# Altium PCB karmanDB.PcbDoc (part 1 of 2)
Units mil, origin at the board's own origin, x right, y up, seen from the top; angles counter-clockwise.
Board outline 6100 x 3250 mil, 4 copper layers (Top Layer, Ground Plane, Power Plane, Bottom Layer), stack 64.4 mil thick; 205 components, 131 nets, 669 pads, 419 vias.
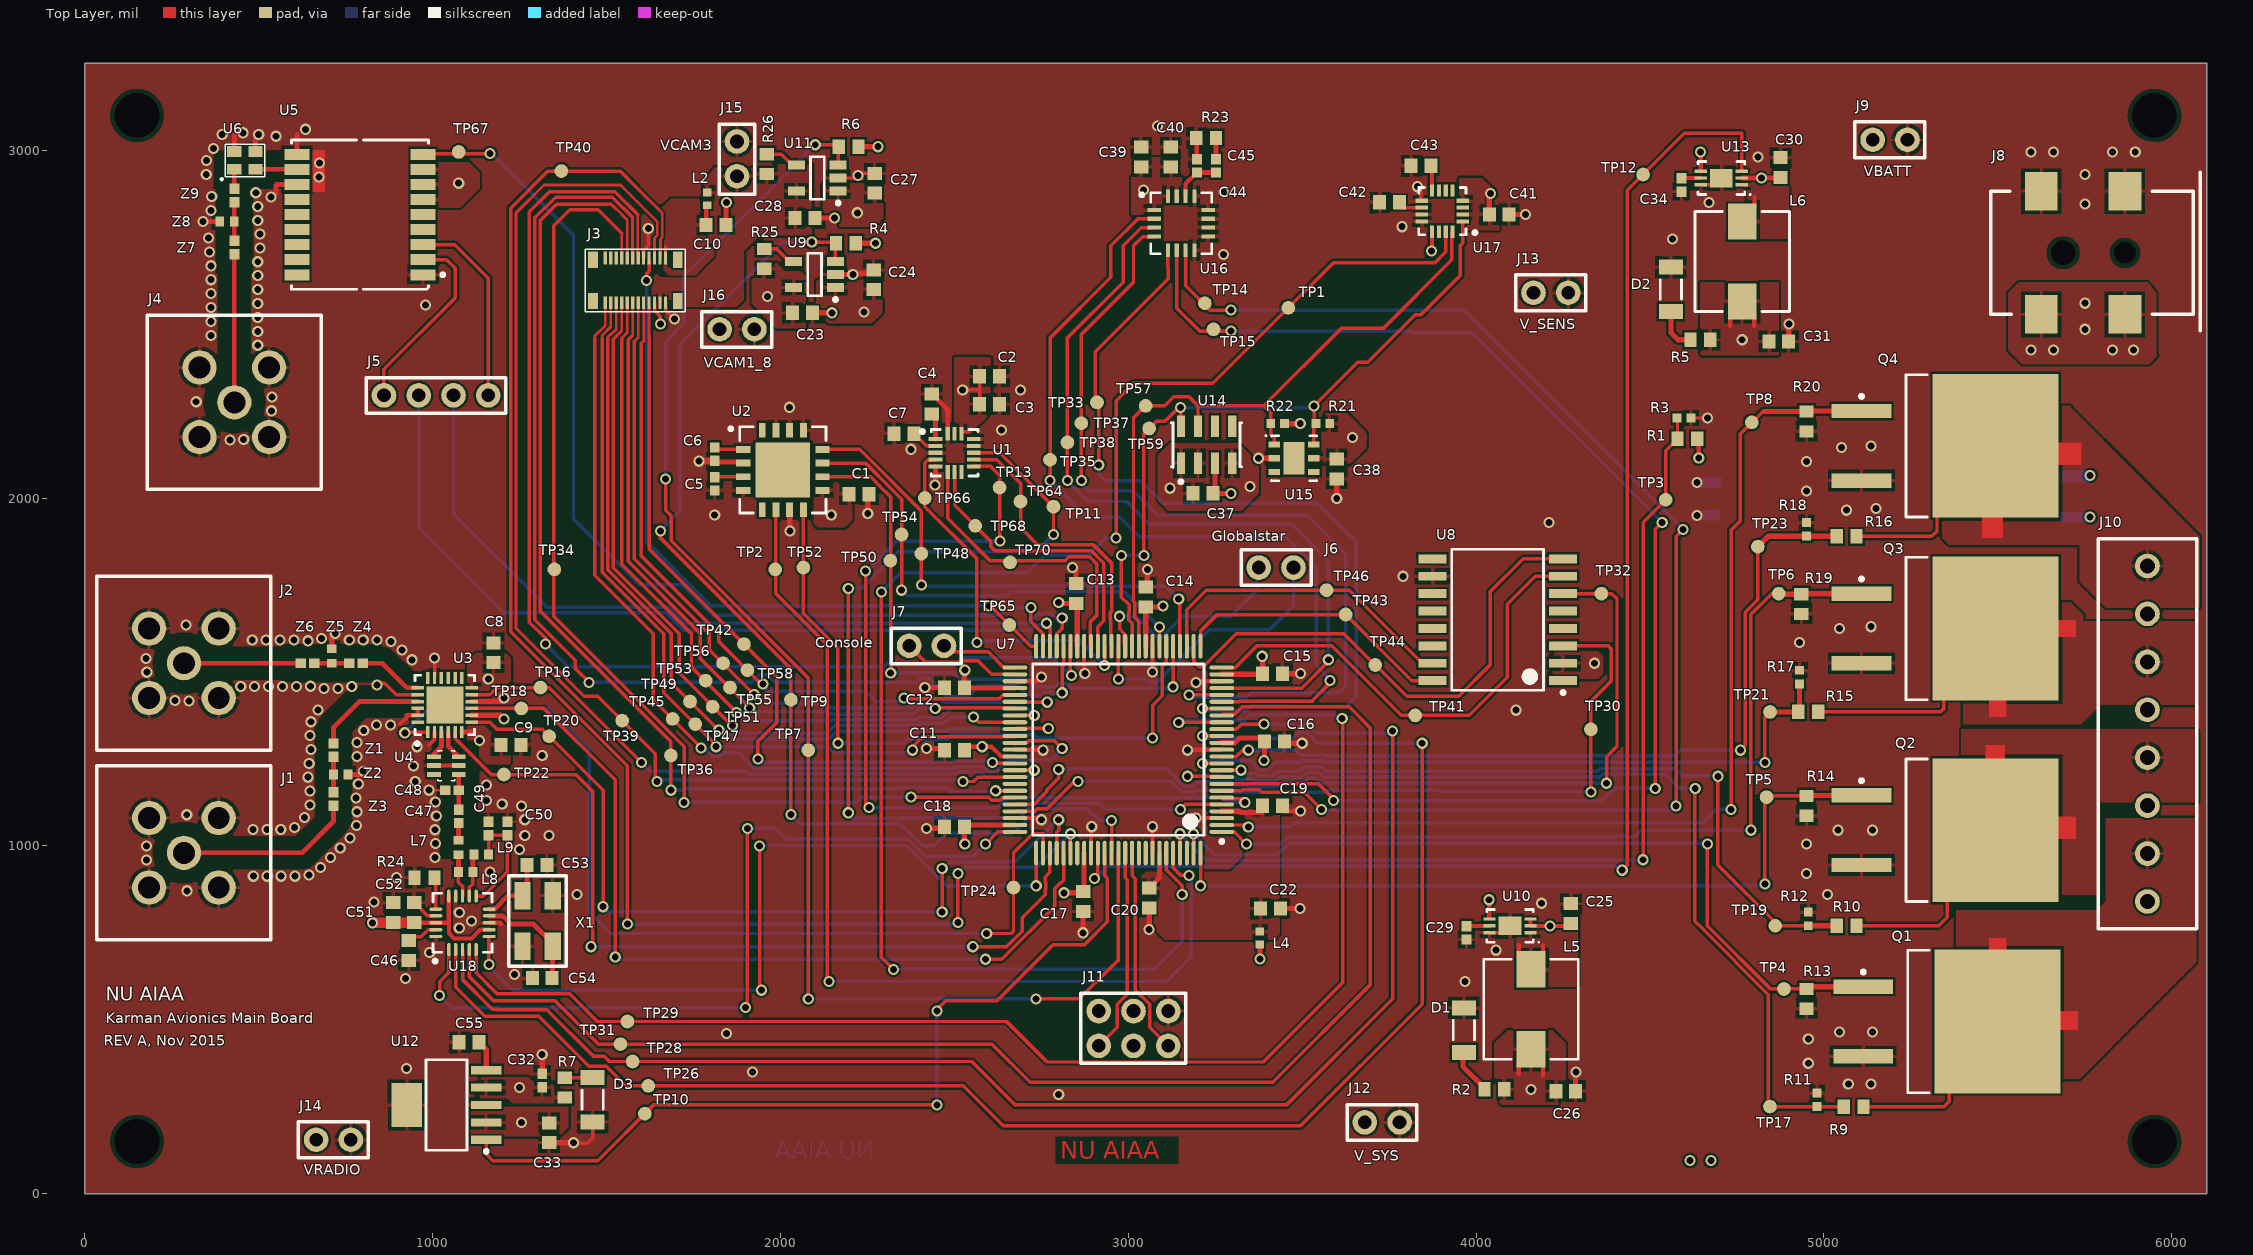
[diagram p0: Top Layer view]
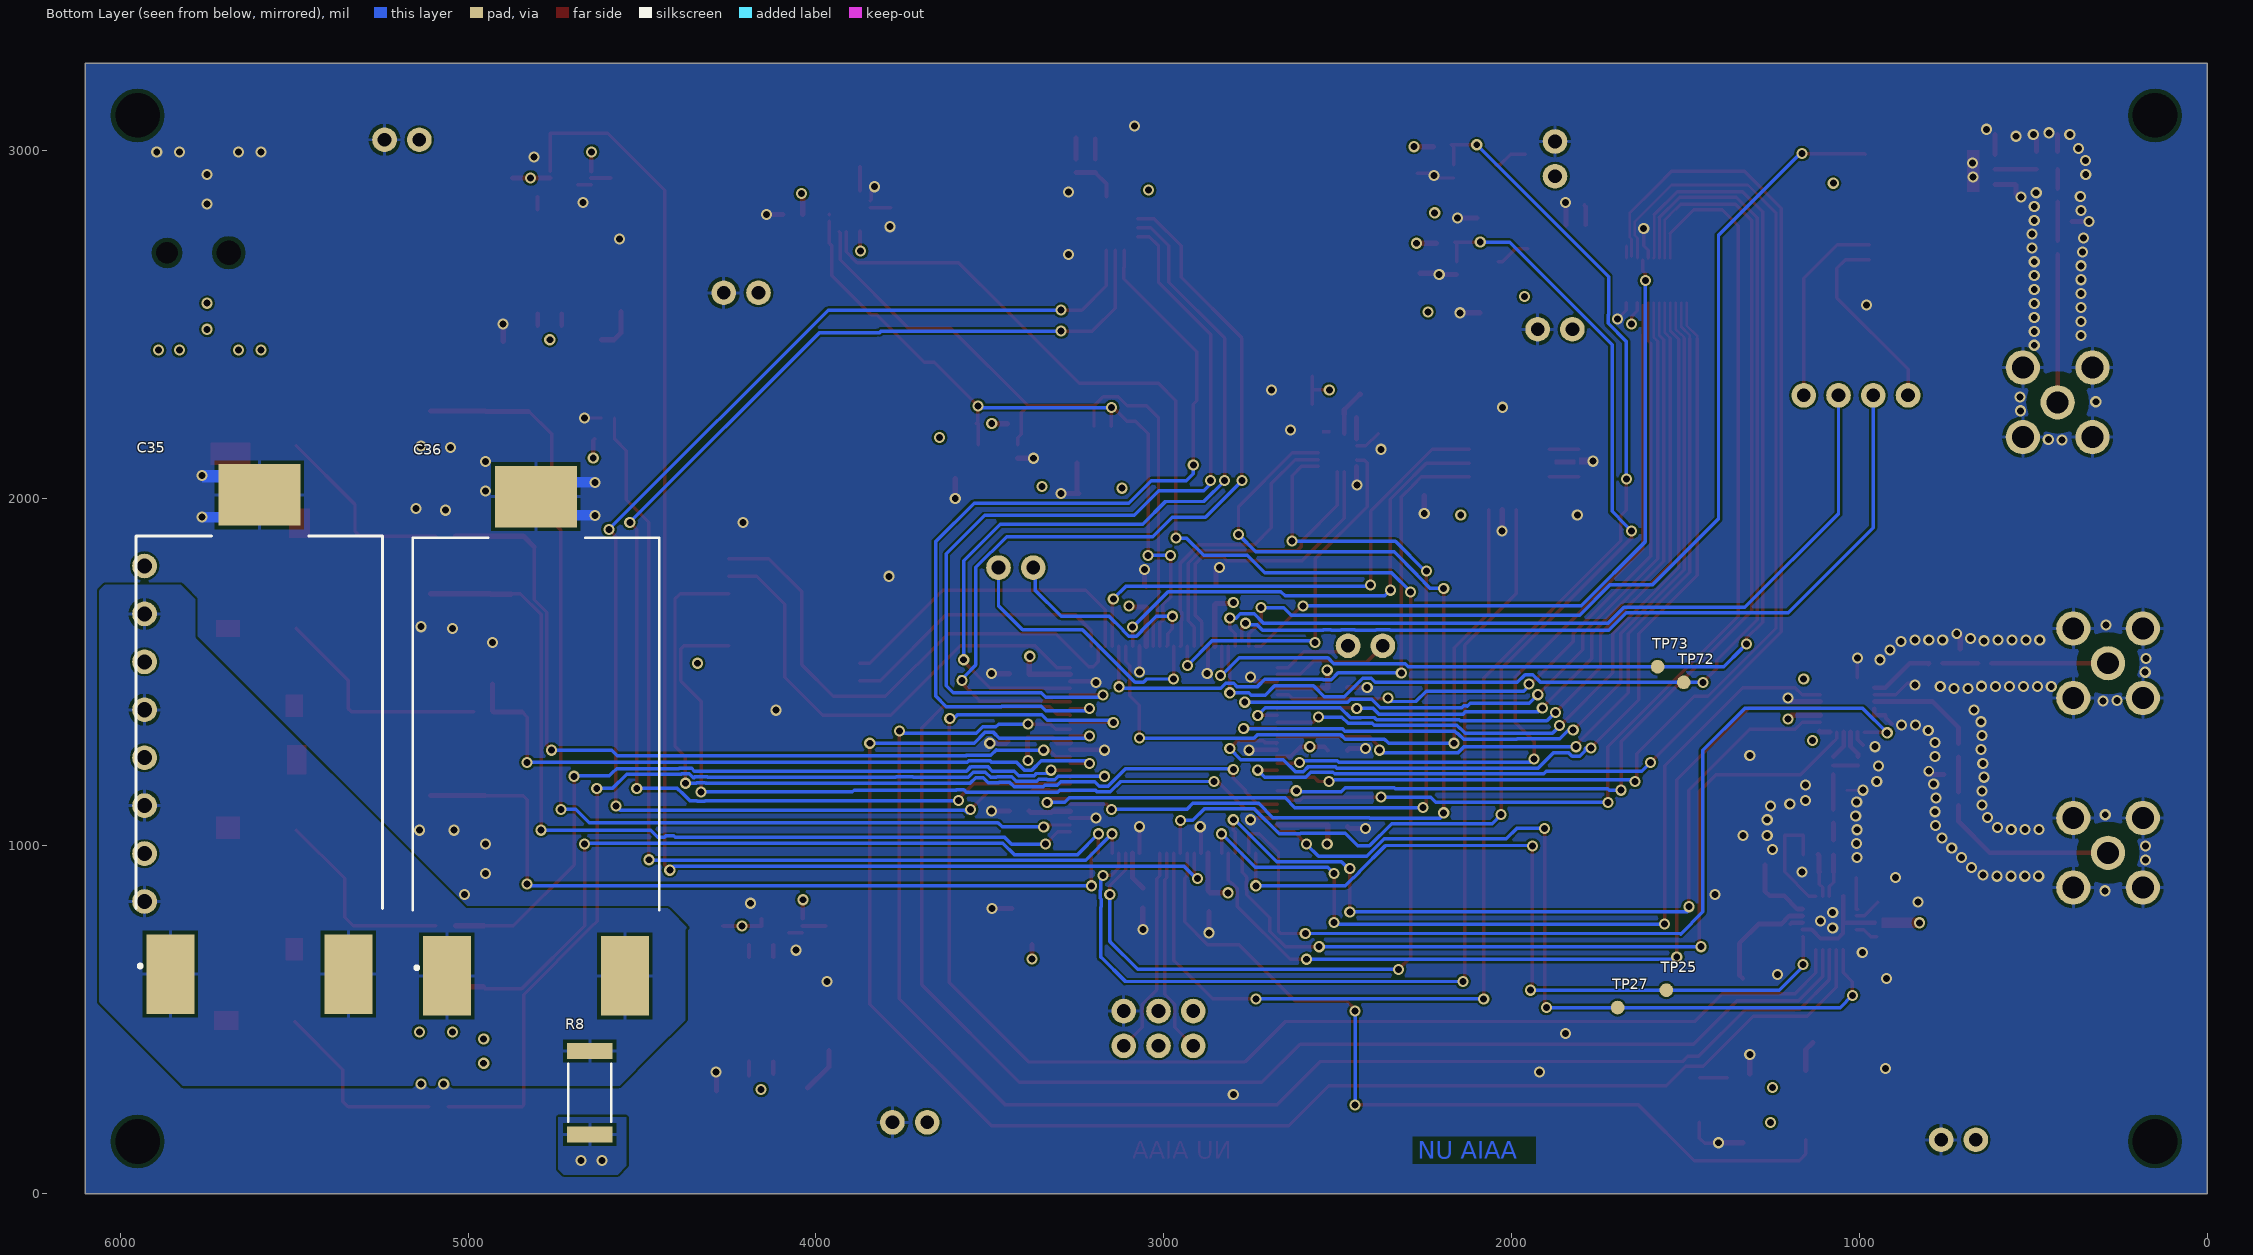
[diagram p1: Bottom Layer view, seen from below]
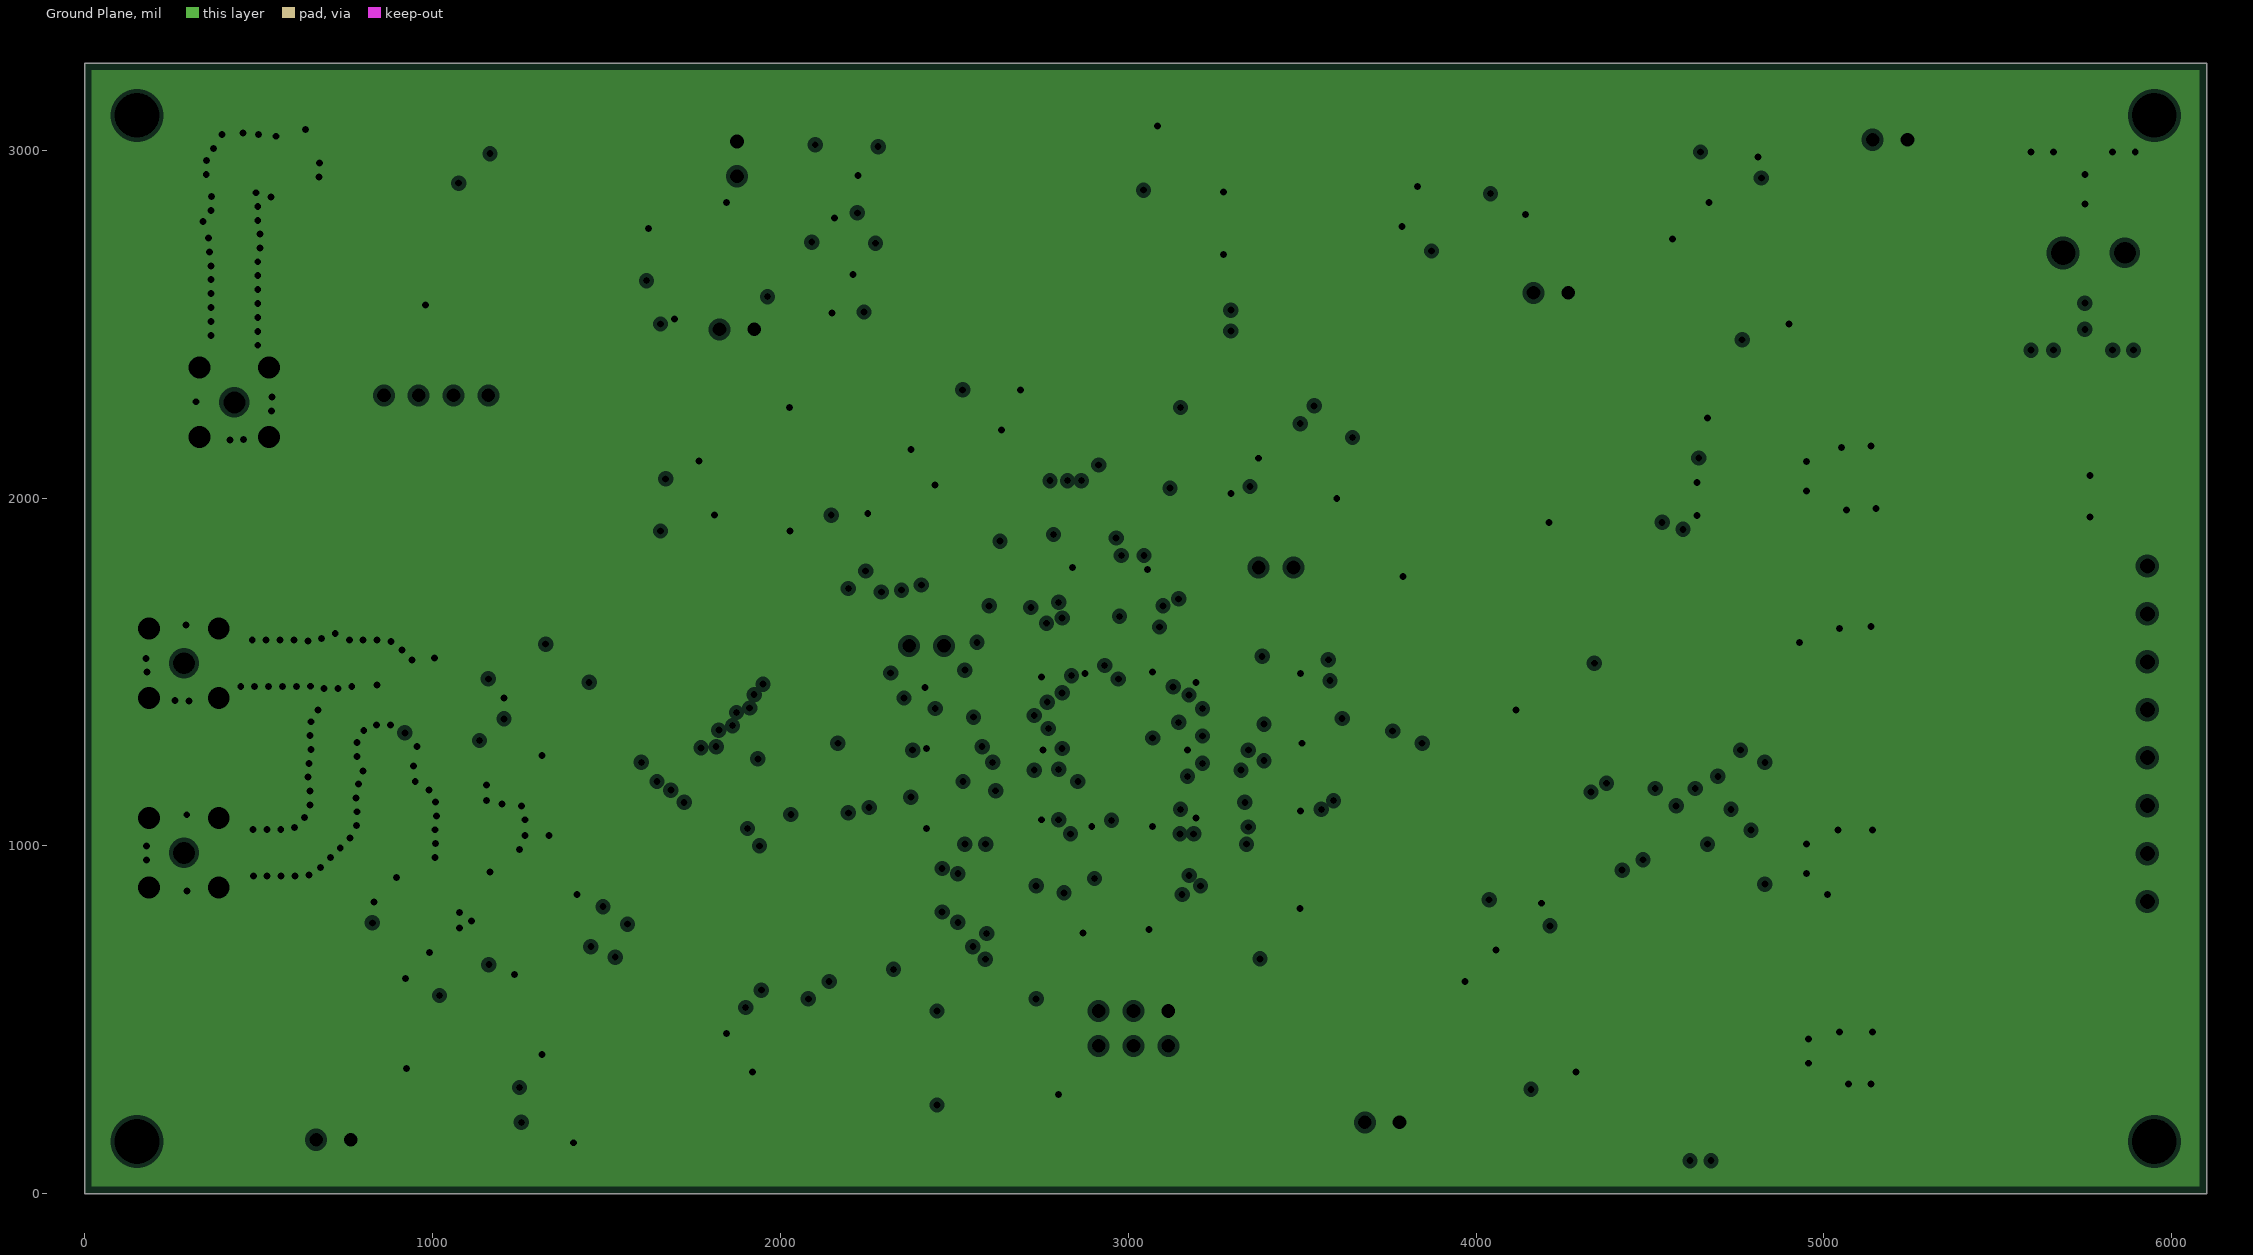
[diagram p2: Ground Plane, clearances drawn from the general rule]
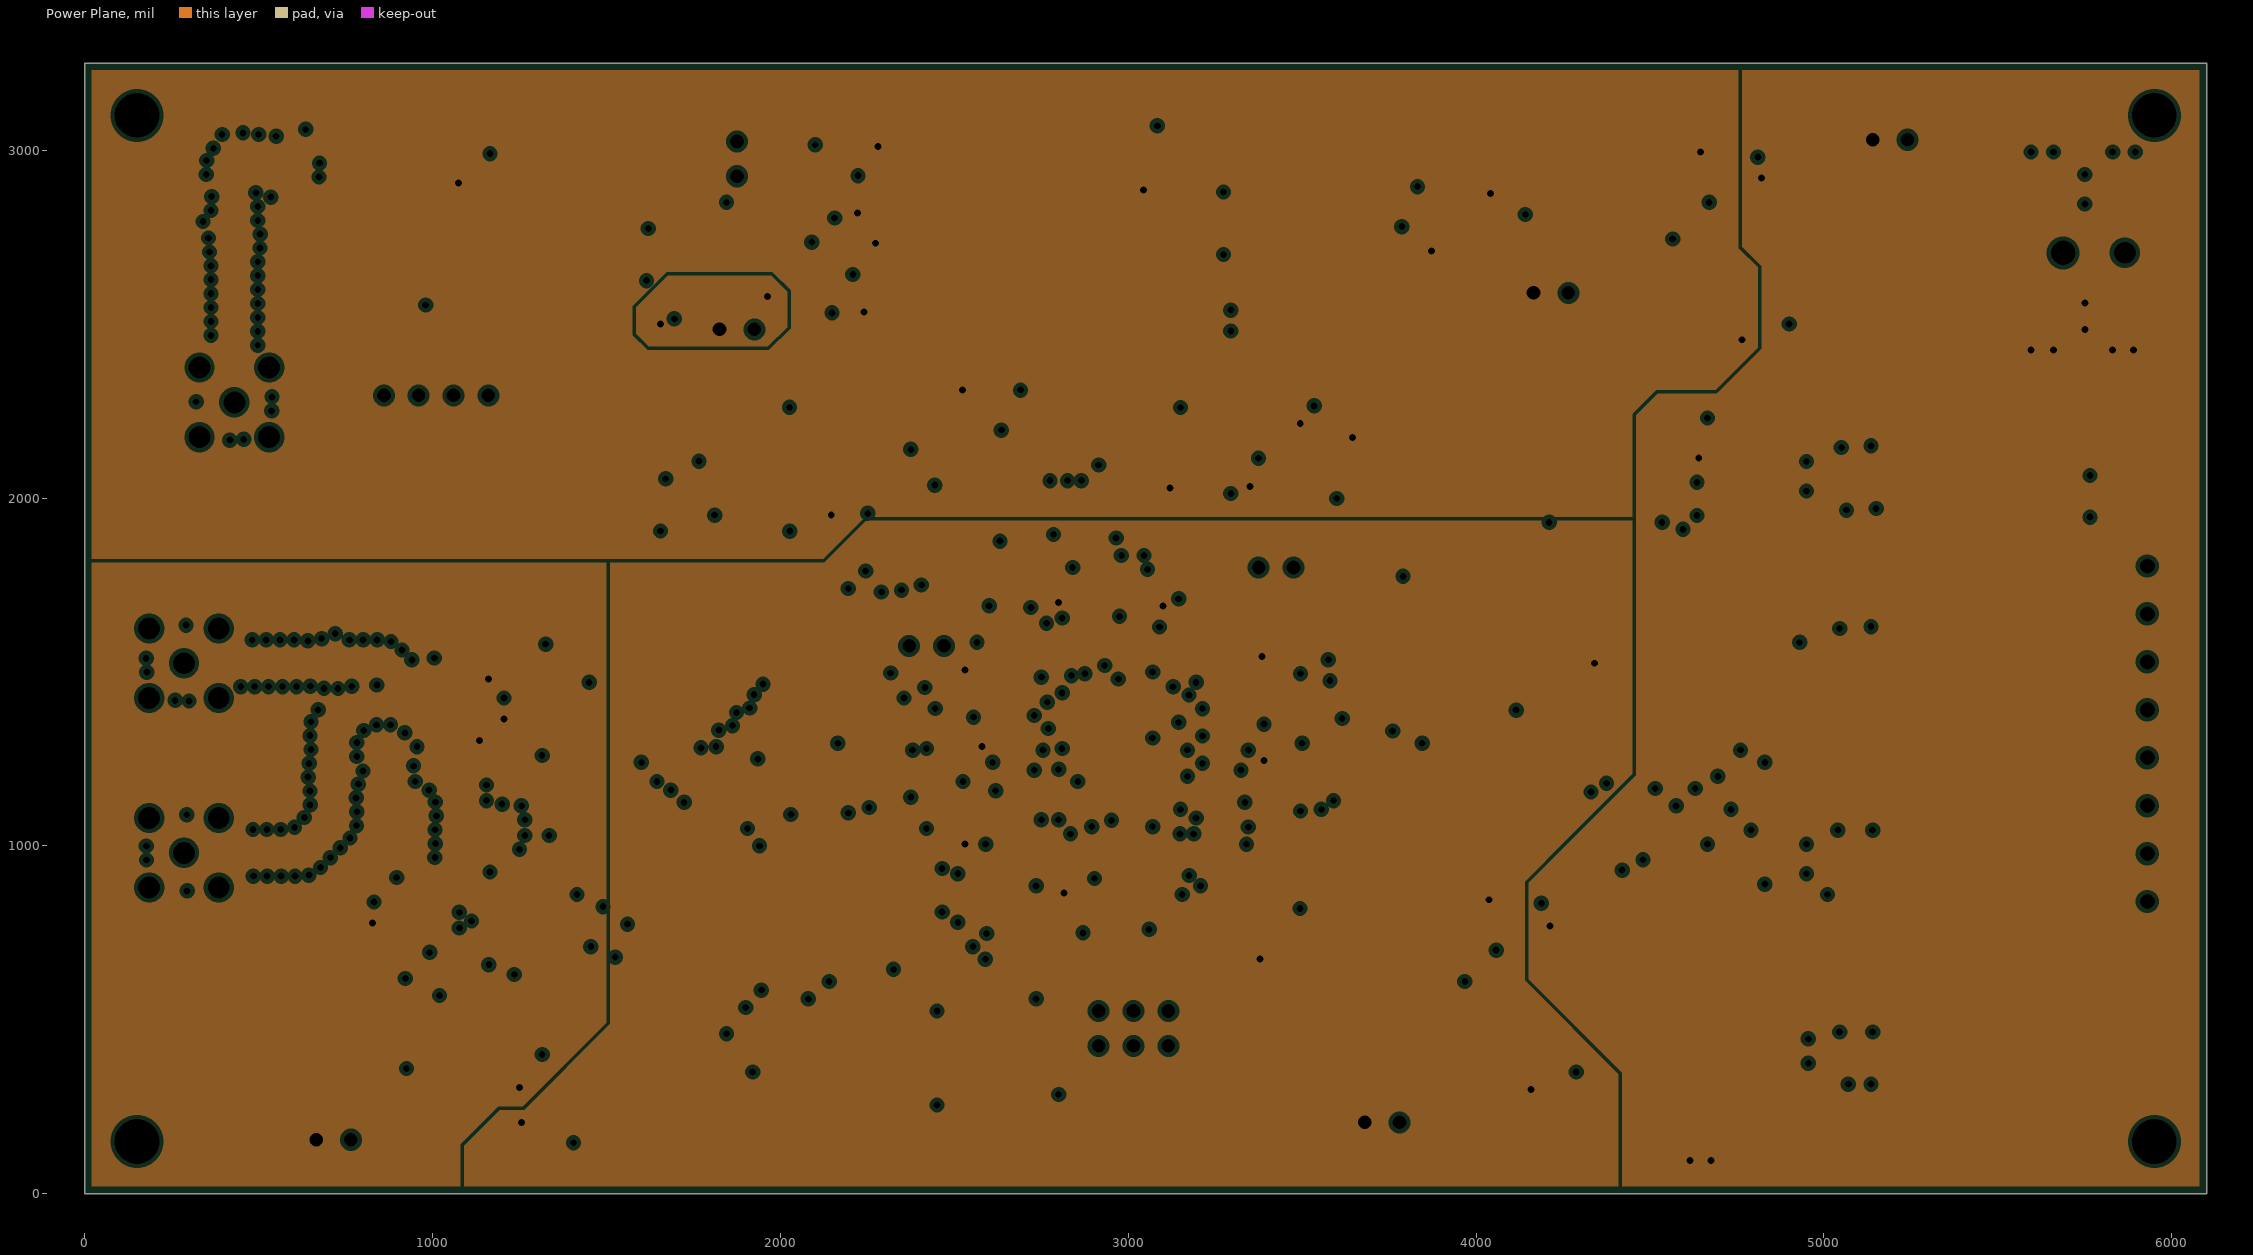
[diagram p3: Power Plane, clearances drawn from the general rule]

## Layer stack, top to bottom
Top Solder: solder mask 0.4, Solder Resist, Dk 3.5
Top Layer: signal copper 1.4
Dielectric 1: prepreg 9.4, FR-4, Dk 4.2
Ground Plane: plane copper 1.4, net GND
Dielectric 3: core 40, FR-4, Dk 4.2
Power Plane: plane copper 1.4, net (Multiple Nets)
Dielectric 2: prepreg 9.4, FR-4, Dk 4.2
Bottom Layer: signal copper 1.4
Bottom Solder: solder mask 0.4, Solder Resist, Dk 3.5

## Board outline
0,0 0,3250 6100,3250 6100,0

## Design rules (kind name [scope] priority, off if disabled: settings)
Clearance Clearance_NPTH [(InPadClass('NPTH'))] p1: gap=12
Clearance 100_Clearance [InNetClass('100_Match_Class') vs InPolygon] p2: gap=40
Clearance 50_Clearance [InNetClass('50_Match_Class') vs InPolygon] p3: gap=40
Clearance [All] p4: gap=6
ComponentClearance ComponentClearance_testpoint [Comment = 'test_point'] p1: gap=0 collisioncheckmode=3 verticalgap=100000 showdistances=FALSE
ComponentClearance [All] p2: gap=10 collisioncheckmode=3 verticalgap=10 showdistances=FALSE
HoleSize [All] p1: absolutevalues=TRUE maxlimit=100 minlimit=15 maxpercent=80.000 minpercent=20.000
MinimumSolderMaskSliver [All] p1: minsoldermaskwidth=6
PlaneClearance MicrostripClearance_1 [(InNetClass('100_Match_Class') OR InNetClass('50_Match_Class'))] p1: clearance=40
PlaneClearance [All] p2: clearance=12
PlaneConnect PlaneConnect_GND [InNet('GND')] p1: planeconnectstyle=Direct reliefexpansion=20 reliefentries=4 reliefconductorwidth=10 reliefairgap=10
PlaneConnect PlaneConnect_1 [All] p2: planeconnectstyle=Relief reliefexpansion=20 reliefentries=4 reliefconductorwidth=10 reliefairgap=10
PolygonConnect PolygonConnect_Via [IsVia] p1: connectstyle=Direct reliefconductorwidth=10 reliefentries=4 polygonreliefangle="90 Angle" airgapwidth=10
PolygonConnect [All] p2: connectstyle=Relief reliefconductorwidth=10 reliefentries=4 polygonreliefangle="90 Angle" airgapwidth=10
RoomDefinition karmanDB_sensors2 [InComponentClass('karmanDB_sensors2')] p1: confinementstyle=ConfineIn formatcopy=TRUE lockcomponents=FALSE outline 2810,2575.71 4422.09,2575.71 4422.09,3090 2810,3090
RoomDefinition karmanDB_sensors1 [InComponentClass('karmanDB_sensors1')] p2: confinementstyle=ConfineIn formatcopy=TRUE lockcomponents=FALSE outline 2979.37,1944.37 3875,1944.37 3875,2300 2979.37,2300
RoomDefinition karmanDB_mem [InComponentClass('karmanDB_mem')] p3: confinementstyle=ConfineIn formatcopy=TRUE lockcomponents=FALSE outline 4385,1930 3742.01,1930 3742.01,1320 4385,1320
RoomDefinition karmanDB_MCU [InComponentClass('karmanDB_MCU')] p4: confinementstyle=ConfineIn formatcopy=TRUE lockcomponents=FALSE outline 3705,1815 2220,1815 2220,305 3705,305
RoomDefinition karmanDB_camera [InComponentClass('karmanDB_camera')] p5: confinementstyle=ConfineIn formatcopy=TRUE lockcomponents=FALSE outline 1396.5,2965 1396.5,2520 2227.99,2520 2227.99,2965
RoomDefinition karmanDB_accel [InComponentClass('karmanDB_accel')] p6: confinementstyle=ConfineIn formatcopy=TRUE lockcomponents=FALSE outline 1746.77,1890.87 2760.95,1890.87 2760.95,2449.41 1746.77,2449.41
RoutingVias [All] p1: holewidth=20 width=30 viastyle="Through Hole" minholewidth=15 minwidth=25 maxholewidth=28 maxwidth=50
SilkToSilkClearance [All] p1 off: silktosilkclearance=10
SolderMaskExpansion [All] p1: expansion=4
UnpouredPolygon [All] p1: allowunpoured=FALSE
Width 50_MATCH [InNetClass('50_Match_Class')] p1: maxlimit=13.68 minlimit=13.68 preferedwidth=13.68 impedancedriven=TRUE minimp=50.000000 maximp=50.000000 favimp=50.000000
Width 100_MATCH [InNetClass('100_Match_Class')] p2: maxlimit=13.68 minlimit=13.68 preferedwidth=13.68 impedancedriven=TRUE minimp=50.000000 maximp=50.000000 favimp=50.000000
Width [All] p3: maxlimit=20 minlimit=8 preferedwidth=10
23 further rules are at their usual default settings.

## Classes and differential pairs
pad class NPTH: Free-NPTH-0 Free-NPTH-1 Free-NPTH-2 Free-NPTH-3 J8-5 J8-6
net class 100_Match_Class: NetU3_4
net class 50_Match_Class: NetC47_1 NetC47_2 NetJ1_PIN NetJ2_PIN NetJ4_PIN NetU3_19 NetU3_21 NetU5_11 NetU6_1 NetZ1_2 NetZ4_2 NetZ7_2
net class PH[0..7]: PH0 PH1 PH2 PH3 PH4 PH5 PH6 PH7
component class karmanDB_transceiver: C46 C47 C48 C49 C50 C51 C52 C53 C54 L7 L8 L9 R24 U18 X1
component class karmanDB_testpoints: TP1 TP2 TP3 TP4 TP5 TP6 TP7 TP8 TP9 TP10 TP11 TP12 TP13 TP14 TP15 TP16 TP17 TP18 TP19 TP20 TP21 TP22 TP23 TP24 TP25 TP26 TP27 TP28 TP29 TP30 TP31 TP32 TP33 TP34 TP35 TP36 TP37 TP38 TP39 TP40 TP41 TP42 TP43 TP44 TP45 TP46 TP47 TP48 TP49 TP50 TP51 TP52 TP53 TP54 TP55 TP56 TP57 TP58 TP59 TP64 TP65 TP66 TP67 TP68 TP70 TP72 TP73
component class karmanDB_sensors2: C39 C40 C41 C42 C43 C44 C45 R23 U16 U17
component class karmanDB_sensors1: C37 C38 R21 R22 U14 U15
component class karmanDB_pyro: C35 C36 J10 Q1 Q2 Q3 Q4 R8 R9 R10 R11 R12 R13 R14 R15 R16 R17 R18 R19 R20
component class karmanDB_power: C23 C24 C25 C26 C27 C28 C29 C30 C31 C32 C33 C34 C55 D1 D2 D3 J8 J9 J12 J13 J14 J15 J16 L5 L6 R1 R2 R3 R4 R5 R6 R7 R25 R26 U9 U10 U11 U12 U13
component class karmanDB_mem: U8
component class karmanDB_MCU: C11 C12 C13 C14 C15 C16 C17 C18 C19 C20 C22 J7 J11 L4 U7
component class karmanDB_gps&gs: J4 J5 J6 U5 U6 Z7 Z8 Z9
component class karmanDB_camera: C10 J3 L2
component class karmanDB_amp: C8 C9 J1 J2 U3 U4 Z1 Z2 Z3 Z4 Z5 Z6
component class karmanDB_accel: C1 C2 C3 C4 C5 C6 C7 U1 U2

## Components (designator, comment, footprint, x,y, rotation, side; value= is the part's Value field where it differs from the comment)
C1 "100n" MURATA_GRM_0603 2226.02,2010.87 r0 top
C2 "100n" MURATA_GRM_0603 2601.46,2350 r0 top
C3 "4.7u" MURATA_GRM_0603 2601.46,2270 r0 top
C4 "100n" MURATA_GRM_0603 2435,2270 r90 top
C5 "1uF" MURATA_GRM_0402 1811.02,2040.87 r90 top
C6 "1uF" MURATA_GRM_0402 1811.02,2125.87 r90 top
C7 "100n" MURATA_GRM_0603 2355,2185 r180 top
C8 "4.7u" MURATA_GRM_0603 1175,1555 r90 top
C9 "100n" MURATA_GRM_0603 1225,1290 r0 top
C10 "10u" MURATA_GRM_0603 1815,2785 r0 top
C11 "100n" MURATA_GRM_0603 2500,1275 r180 top
C12 "100n" MURATA_GRM_0603 2500,1455 r180 top
C13 "100n" MURATA_GRM_0603 2850,1725 r90 top
C14 "100n" MURATA_GRM_0603 3050,1715 r90 top
C15 "100n" MURATA_GRM_0603 3415,1495 r0 top
C16 "100n" MURATA_GRM_0603 3420,1300 r0 top
C17 "100n" MURATA_GRM_0603 2870,840 r270 top
C18 "100n" MURATA_GRM_0603 2500,1055 r180 top
C19 "100n" MURATA_GRM_0603 3415,1115 r0 top
C20 "100n" MURATA_GRM_0603 3060,850 r270 top
C22 "10u" MURATA_GRM_0603 3408.54,820 r0 top
C23 "10u" MURATA_GRM_0603 2063.03,2532.44 r0 top
C24 "10u" MURATA_GRM_0603 2268.03,2627.44 r90 top
C25 "10u" MURATA_GRM_0603 4272.52,805 r90 top
C26 "22u" MURATA_GRM_0603 4257.52,295 r0 top
C27 "10u" MURATA_GRM_0603 2270.9,2905.03 r90 top
C28 "10u" MURATA_GRM_0603 2070.9,2805.03 r0 top
C29 "1uF" MURATA_GRM_0402 3972.52,750 r270 top
C30 "10u" MURATA_GRM_0603 4875,2950 r90 top
C31 "22u" MURATA_GRM_0603 4870,2450 r0 top
C32 "1uF" MURATA_GRM_0402 1315,325 r90 top
C33 "10u" MURATA_GRM_0603 1335,175 r270 top
C34 "1uF" MURATA_GRM_0402 4590,2900 r270 top
C35 "22mF" AVX_BZ01 5600,1320 r90 bottom
C36 "22mF" AVX_BZ01 4805,1315 r90 bottom
C37 "100n" MURATA_GRM_0603 3215,2013.15 r0 top
C38 "100n" MURATA_GRM_0603 3599.37,2083.74 r270 top
C39 "10u" MURATA_GRM_0603 3037.09,2980 r90 top
C40 "100n" MURATA_GRM_0603 3122.09,2980 r90 top
C41 "100n" MURATA_GRM_0603 4066.46,2815 r0 top
C42 "4.7u" MURATA_GRM_0603 3751.46,2850 r180 top
C43 ".22u" MURATA_GRM_0603 3841.46,2955 r180 top
C44 "10n" MURATA_GRM_0402 3197.09,2955 r270 top
C45 "470nF" MURATA_GRM_0402 3252.09,2955 r270 top
C46 "33n" MURATA_GRM_0603 931.65,698.74 r270 top
C47 "1.5p" MURATA_GRM_0402 1075,1085 r90 top
C48 "1p" MURATA_GRM_0402 1055.71,1160 r180 top
C49 "2.2n" MURATA_GRM_0402 1160.87,1050 r90 top
C50 "4.7p" MURATA_GRM_0402 1215,1050 r90 top
C51 "10n" MURATA_GRM_0603 886.65,808.74 r90 top
C52 "1n" MURATA_GRM_0603 946.65,808.74 r90 top
C53 "22p" MURATA_GRM_0603 1300,945 r0 top
C54 "22p" MURATA_GRM_0603 1315,620 r180 top
C55 "100n" MURATA_GRM_0603 1105,435 r180 top
D1 "LED_LITEON_LTST-C150CKT" LITEON_LTST-C150 3965,470 r90 top
D2 "LED_LITEON_LTST-C150CKT" LITEON_LTST-C150 4560,2600 r90 top
D3 "LED_LITEON_LTST-C150CKT" LITEON_LTST-C150 1460,270 r270 top
J1 "MOLEX_0733910060" MOLEX_0733910060 285,980 r90 top
J2 "MOLEX_0733910060" MOLEX_0733910060 285,1525 r0 top
J3 "AXT524124" AXT524124 1496.5,2690 r0 top
J4 "MOLEX_0733910060" MOLEX_0733910060 430,2275 r0 top
J5 "961104-6404-AR" 961104-6404-AR 860,2295 r0 top
J6 "961102-6404-AR" 3M_961102-6X04 3475,1800 r180 top
J7 "961102-6404-AR" 3M_961102-6X04 2370,1575 r0 top
J8 "PJ-002AH-SMT-TR" PJ-002AH-SMT 5865,2705 r180 top
J9 "961102-6404-AR" 3M_961102-6X04 5140,3030 r0 top
J10 "1751303" 1751303 5930,840 r90 top
J11 "961206-6404-AR" 961206-6404-AR 2915,525 r0 top
J12 "961102-6404-AR" 3M_961102-6X04 3680,205 r0 top
J13 "961102-6404-AR" 3M_961102-6X04 4165,2590 r0 top
J14 "961102-6404-AR" 3M_961102-6X04 665,155 r0 top
J15 "961102-6404-AR" 3M_961102-6X04 1875,2925 r90 top
J16 "961102-6404-AR" 3M_961102-6X04 1825,2485 r0 top
L2 "BLM15BB221SN1D" BLM15 1790,2860 r90 top
L4 "BLM15BB221SN1D" BLM15 3378.54,735 r270 top
L5 "6.8uH" TDK_RLF7030 4157.52,530 r90 top
L6 "6.8uH" TDK_RLF7030 4765,2680 r90 top
L7 "3.9n" PANASONIC_ELJRF 1074.13,995 r90 top
L8 "8.2n" PANASONIC_ELJRF 1095,925 r180 top
L9 "2.7n" PANASONIC_ELJRF 1140,975 r0 top
Q1 "STP36NF06L" ST(P/B)36NF06L 5355,495 r0 top
Q2 "STP36NF06L" ST(P/B)36NF06L 5350,1045 r0 top
Q3 "STP36NF06L" ST(P/B)36NF06L 5350,1625 r0 top
Q4 "STP36NF06L" ST(P/B)36NF06L 5350,2150 r0 top
R1 "100K" PANASONIC_ERJ3R 4607.52,2170 r180 top
R2 "150" PANASONIC_ERJ3R 4052.52,300 r0 top
R3 "33k" PANASONIC_ERJ2R_SERIES 4597.52,2230 r0 top
R4 "10K" PANASONIC_ERJ3R 2188.03,2732.44 r180 top
R5 "150" PANASONIC_ERJ3R 4645,2455 r180 top
R6 "10K" PANASONIC_ERJ3R 2195.9,3010.03 r180 top
R7 "150" PANASONIC_ERJ3R 1380,305 r90 top
R8 "100" PANASONIC_ERJ1T 4650,290 r90 bottom
R9 "100K" PANASONIC_ERJ3R 5085,250 r180 top
R10 "100K" PANASONIC_ERJ3R 5065,770 r180 top
R11 "33k" PANASONIC_ERJ2R_SERIES 4980,270 r90 top
R12 "33k" PANASONIC_ERJ2R_SERIES 4955,790 r90 top
R13 "15k" PANASONIC_ERJ3R 4950,560 r270 top
R14 "15k" PANASONIC_ERJ3R 4950,1115 r270 top
R15 "100K" PANASONIC_ERJ3R 4955,1385 r180 top
R16 "100K" PANASONIC_ERJ3R 5065,1890 r180 top
R17 "33k" PANASONIC_ERJ2R_SERIES 4930,1485 r90 top
R18 "33k" PANASONIC_ERJ2R_SERIES 4950,1910 r90 top
R19 "15k" PANASONIC_ERJ3R 4935,1695 r270 top
R20 "15k" PANASONIC_ERJ3R 4950,2220 r270 top
R21 "4.7k" PANASONIC_ERJ2R_SERIES 3559.37,2213.74 r180 top
R22 "4.7k" PANASONIC_ERJ2R_SERIES 3429.37,2213.74 r180 top
R23 "10K" PANASONIC_ERJ3R 3223.54,3035 r0 top
R24 "22K" PANASONIC_ERJ3R 976.65,908.74 r180 top
R25 "100K" PANASONIC_ERJ3R 1953.03,2687.44 r270 top
R26 "100K" PANASONIC_ERJ3R 1960.9,2960.03 r270 top
TP1 "test_point" TESTPOINT 3460,2546.77 r90 top
TP2 "test_point" TESTPOINT 1985,1795 r90 top
TP3 "test_point" TESTPOINT 4545,1995 r90 top
TP4 "test_point" TESTPOINT 4885,588.54 r90 top
TP5 "test_point" TESTPOINT 4835,1140 r90 top
TP6 "test_point" TESTPOINT 4870,1725 r90 top
TP7 "test_point" TESTPOINT 2080,1275 r90 top
TP8 "test_point" TESTPOINT 4792.5,2217.5 r90 top
TP9 "test_point" TESTPOINT 2030,1420 r90 top
TP10 "test_point" TESTPOINT 1610,230 r90 top
TP11 "test_point" TESTPOINT 2785,1975 r90 top
TP12 "test_point" TESTPOINT 4480,2930 r90 top
TP13 "test_point" TESTPOINT 2630,2030 r90 top
TP14 "test_point" TESTPOINT 3220,2560 r90 top
TP15 "test_point" TESTPOINT 3245,2485 r90 top
TP16 "test_point" TESTPOINT 1310,1455 r180 top
TP17 "test_point" TESTPOINT 4844.69,250.32 r90 top
TP18 "test_point" TESTPOINT 1255,1395 r180 top
TP19 "test_point" TESTPOINT 4860,770.32 r90 top
TP20 "test_point" TESTPOINT 1335,1315 r180 top
TP21 "test_point" TESTPOINT 4845,1385 r90 top
TP22 "test_point" TESTPOINT 1205,1205 r180 top
TP23 "test_point" TESTPOINT 4810,1860 r90 top
TP24 "test_point" TESTPOINT 2670,880 r90 top
TP25 "test_point" TESTPOINT 1555,585 r180 bottom
TP26 "test_point" TESTPOINT 1620,310 r90 top
TP27 "test_point" TESTPOINT 1695,535 r180 bottom
TP28 "test_point" TESTPOINT 1575,380 r90 top
TP29 "test_point" TESTPOINT 1560,495 r90 top
TP30 "test_point" TESTPOINT 4330,1335 r90 top
TP31 "test_point" TESTPOINT 1540,430 r90 top
TP32 "test_point" TESTPOINT 4360,1725 r90 top
TP33 "test_point" TESTPOINT 2910,2275 r90 top
TP34 "test_point" TESTPOINT 1350,1795 r90 top
TP35 "test_point" TESTPOINT 2775,2110 r90 top
TP36 "test_point" TESTPOINT 1685,1260 r90 top
TP37 "test_point" TESTPOINT 2865,2215 r90 top
TP38 "test_point" TESTPOINT 2825,2160 r90 top
TP39 "test_point" TESTPOINT 1545,1360 r90 top
TP40 "test_point" TESTPOINT 1370,2940 r90 top
TP41 "test_point" TESTPOINT 3825,1375 r180 top
TP42 "test_point" TESTPOINT 1895,1580 r90 top
TP43 "test_point" TESTPOINT 3625,1665 r90 top
TP44 "test_point" TESTPOINT 3710,1520 r90 top
TP45 "test_point" TESTPOINT 1690,1365 r90 top
TP46 "test_point" TESTPOINT 3570,1735 r90 top
TP47 "test_point" TESTPOINT 1755,1350 r90 top
TP48 "test_point" TESTPOINT 2405,1840 r90 top
TP49 "test_point" TESTPOINT 1740,1415 r90 top
TP50 "test_point" TESTPOINT 2316,1820 r90 top
TP51 "test_point" TESTPOINT 1805,1400 r90 top
TP52 "test_point" TESTPOINT 2065.83,1800 r90 top
TP53 "test_point" TESTPOINT 1785,1475 r90 top
TP54 "test_point" TESTPOINT 2348.23,1895 r90 top
TP55 "test_point" TESTPOINT 1855,1455 r90 top
TP56 "test_point" TESTPOINT 1835,1525 r90 top
TP57 "test_point" TESTPOINT 3050,2265 r90 top
TP58 "test_point" TESTPOINT 1905,1505 r90 top
TP59 "test_point" TESTPOINT 3060,2200 r90 top
TP64 "test_point" TESTPOINT 2690,1990 r90 top
TP65 "test_point" TESTPOINT 2658,1635 r90 top
TP66 "test_point" TESTPOINT 2415,2000 r90 top
TP67 "test_point" TESTPOINT 1075,2995 r90 top
TP68 "test_point" TESTPOINT 2560,1920 r90 top
TP70 "test_point" TESTPOINT 2660,1815 r90 top
TP72 "test_point" TESTPOINT 1505,1470 r90 bottom
TP73 "test_point" TESTPOINT 1580,1515 r90 bottom
U1 "FXLS8471QR1" "3 FXLS8471QR1" 2500.75,2130 r0 top
U2 "MMA6555KW" "6 MMA6555KW" 2006.77,2080.87 r0 top
U3 "SE2436L" "9 SE2436L" 1035,1405 r90 top
U4 "748421245" 748421245 1075,1205 r270 top
U5 "Max-7Q" "11 MAX-7Q" 791.1,2815 r180 top
U6 "SF1186G" sf1186g 430,2945 r0 top
U7 "ATxmega128A1-AU" 100A_N 2971.46,1276.46 r180 top
U8 "S70FL01GSAGMFI011" "15 S70FL01GSAGMFI011" 4062.01,1650 r180 top
U9 "MCP1824T-1802E/OT" "26-27 MCP1824T(-3002E/OT)(-1802E/OT)" 2098.03,2642.44 r180 top
U10 "LTC3621IDCB-3.3#TRMPBF" "29 LTC3621IDCB-3.3" 4097.52,770 r180 top
U11 "MCP1824T-3002E/OT" "26-27 MCP1824T(-3002E/OT)(-1802E/OT)" 2105.9,2920.03 r180 top
U12 "TPS79630DCQR" TPS79630 1040,255 r180 top
U13 "LTC3621IDCB-3.3#TRMPBF" "29 LTC3621IDCB-3.3" 4705,2920 r180 top
U14 "MS560702BA03-50" "8 MS560702BA03-50" 3225,2153.15 r90 top
U15 "Si7021" "7 Si7021-A20" 3476.46,2114.37 r0 top
U16 "L3G4200DTR" "4 L3G4200D" 3152.09,2790 r0 top
U17 "HMC5883L-TR" "5 HMC5883L-TR" 3902.91,2825 r180 top
U18 "NORDIC_NRF24L01P" NORDIC_nRF24L01P 1085.94,778.74 r90 top
X1 "16M" TXC_7B_SERIES 1301.65,783.74 r270 top
Z1 "CAP_GENERIC_0402" MURATA_GRM_0402 715,1275 r270 top
Z2 "IND_GENERIC_0402" PANASONIC_ELJRF 735.87,1205 r180 top
Z3 "CAP_GENERIC_0402" MURATA_GRM_0402 715,1135 r270 top
Z4 "CAP_GENERIC_0402" MURATA_GRM_0402 780,1525 r180 top
Z5 "IND_GENERIC_0402" PANASONIC_ELJRF 710,1545.87 r270 top
Z6 "CAP_GENERIC_0402" MURATA_GRM_0402 640,1525 r180 top
Z7 "CAP_GENERIC_0402" MURATA_GRM_0402 430,2720 r90 top
Z8 "IND_GENERIC_0402" PANASONIC_ELJRF 409.13,2795 r0 top
Z9 "CAP_GENERIC_0402" MURATA_GRM_0402 430,2870 r90 top

## Footprints (in the part's own frame and the unit in brackets; to place one, negate y for a bottom-side part, rotate by r counter-clockwise, add the part's x,y. Pads: shape width x height; smd on the part's side, far side on the other; paste and mask are expansions set on the pad)
"3 FXLS8471QR1" [mm]
  rect 1x0.3 smd: 1(-1.4,1) 2(-1.4,0.5) 3(-1.4,0) 4(-1.4,-0.5) 5(-1.4,-1) 9(1.4,-1) 10(1.4,-0.5) 11(1.4,0) 12(1.4,0.5) 13(1.4,1)
  rect 0.3x1 smd: 6(-0.5,-1.4) 7(0,-1.4) 8(0.5,-1.4) 14(0.5,1.4) 15(0,1.4) 16(-0.5,1.4)
  silkscreen extent -2.47,-1.7 1.7,1.7, body extent -1.55,-1.55 1.55,1.55, height 1
3M_961102-6X04 [mm] "2 Pin Header"
  round 1.8 hole 1: 1(0,0) 2(2.54,0)
  silkscreen extent -1.3,-1.3 3.8,1.3
"4 L3G4200D" [mm] "QFN, 16-Leads, Body 4.00x4.00mm, Pitch 0.65mm, IPC Low Density"
  rect 1x0.3 smd: 1(-1.975,0.975) 2(-1.975,0.325) 3(-1.975,-0.325) 4(-1.975,-0.975) 9(1.975,-0.975) 10(1.975,-0.325) 11(1.975,0.325) 12(1.975,0.975)
  rect 0.3x1 smd: 5(-0.975,-1.975) 6(-0.325,-1.975) 7(0.325,-1.975) 8(0.975,-1.975) 13(0.975,1.975) 14(0.325,1.975) 15(-0.325,1.975) 16(-0.975,1.975)
  silkscreen extent -3,-2.22 2.22,2.22, body extent -2.07,-2.07 2.07,2.07, height 1.1
"5 HMC5883L-TR" [mm] "QFN, 16-Leads, Body 3.00x3.00mm, Pitch 0.50mm, IPC Low Density"
  rect 0.9x0.3 smd: 1(-1.5,0.75) 2(-1.5,0.25) 3(-1.5,-0.25) 4(-1.5,-0.75) 9(1.5,-0.75) 10(1.5,-0.25) 11(1.5,0.25) 12(1.5,0.75)
  rect 0.3x0.9 smd: 5(-0.75,-1.5) 6(-0.25,-1.5) 7(0.25,-1.5) 8(0.75,-1.5) 13(0.75,1.5) 14(0.25,1.5) 15(-0.25,1.5) 16(-0.75,1.5)
  silkscreen extent -2.5,-1.73 1.73,1.73, body extent -1.58,-1.58 1.58,1.58, height 1
"6 MMA6555KW" [mm] "QFN, 16-Leads, Body 6.00x6.00mm, Pitch 1.00mm, Thermal Pad 4.00x4.00mm, IPC Low Density"
  rect 1.05x0.5 smd: 1(-2.9,1.5) 2(-2.9,0.5) 3(-2.9,-0.5) 4(-2.9,-1.5) 9(2.9,-1.5) 10(2.9,-0.5) 11(2.9,0.5) 12(2.9,1.5)
  rect 0.5x1.05 smd: 5(-1.5,-2.9) 6(-0.5,-2.9) 7(0.5,-2.9) 8(1.5,-2.9) 13(1.5,2.9) 14(0.5,2.9) 15(-0.5,2.9) 16(-1.5,2.9)
  rect 4x4 smd: 17(0,0)
  silkscreen extent -3.92,-3.15 3.15,3.15, body extent -3,-3 3,3, height 2.03
"7 Si7021-A20" [mm] "SON, 6-Leads, Body 3.00x3.00mm, Pitch 1.00mm, Thermal Pad 2.40x1.50mm, IPC Low Density"
  rect 0.85x0.45 smd mask+0.102: 1(-1.45,1) 2(-1.45,0) 3(-1.45,-1) 4(1.45,-1) 5(1.45,0) 6(1.45,1)
  rect 1.5x2.4 smd: 7(0,0)
  silkscreen extent -2.1,-1.65 1.65,1.7, body extent -1.5,-1.5 1.5,1.5, height 0.8
"8 MS560702BA03-50" [mm] "LCC, 8-Pins, Body 3.00x4.70mmx1.00mm, Pitch 1.25mm, IPC Low Density"
  rect 1.6x0.6 smd: 1(-1.35,1.875) 2(-1.35,0.625) 3(-1.35,-0.625) 4(-1.35,-1.875) 5(1.35,-1.875) 6(1.35,-0.625) 7(1.35,0.625) 8(1.35,1.875)
  silkscreen extent -2.82,-2.58 1.6,2.57, body extent -1.56,-2.35 1.5,2.41, height 1
"9 SE2436L" [mm] "QFN, 24-Leads, Body 4.00x4.00mm, Pitch 0.50mm, Thermal Pad 2.70x2.70mm, IPC Low Density"
  rect 0.9x0.25 smd: 1(-1.975,1.25) 2(-1.975,0.75) 3(-1.975,0.25) 4(-1.975,-0.25) 5(-1.975,-0.75) 6(-1.975,-1.25) 13(1.975,-1.25) 14(1.975,-0.75) 15(1.975,-0.25) 16(1.975,0.25) 17(1.975,0.75) 18(1.975,1.25)
  rect 0.25x0.9 smd: 7(-1.25,-1.975) 8(-0.75,-1.975) 9(-0.25,-1.975) 10(0.25,-1.975) 11(0.75,-1.975) 12(1.25,-1.975) 19(1.25,1.975) 20(0.75,1.975) 21(0.25,1.975) 22(-0.25,1.975) 23(-0.75,1.975) 24(-1.25,1.975)
  rect 2.7x2.7 smd: 25(0,0)
  silkscreen extent -2.95,-2.17 2.17,2.17, body extent -2.02,-2.02 2.02,2.02, height 0.9
"11 MAX-7Q" [mm] "LCC, 18-Pins, Body 9.70x10.35mmx2.70mm, Pitch 1.10mm, IPC Low Density"
  rect 1.8x0.8 smd: 1(-4.6,4.4) 2(-4.6,3.3) 3(-4.6,2.2) 4(-4.6,1.1) 5(-4.6,0) 6(-4.6,-1.1) 7(-4.6,-2.2) 8(-4.6,-3.3) 9(-4.6,-4.4) 10(4.6,-4.4) 11(4.6,-3.3) 12(4.6,-2.2) 13(4.6,-1.1) 14(4.6,0) 15(4.6,1.1) 16(4.6,2.2) 17(4.6,3.3) 18(4.6,4.4)
  silkscreen extent -6.18,-5.45 5,5.45, body extent -4.85,-5.18 4.85,5.17, height 2.7
"15 S70FL01GSAGMFI011" [mm] "SOIC, 16-Leads, Body 10.30x7.50mm, Pitch 1.27mm, IPC Low Density"
  rect 2.05x0.65 smd: 1(-4.775,4.445) 2(-4.775,3.175) 3(-4.775,1.905) 4(-4.775,0.635) 5(-4.775,-0.635) 6(-4.775,-1.905) 7(-4.775,-3.175) 8(-4.775,-4.445) 9(4.775,-4.445) 10(4.775,-3.175) 11(4.775,-1.905) 12(4.775,-0.635) 13(4.775,0.635) 14(4.775,1.905) 15(4.775,3.175) 16(4.775,4.445)
  silkscreen extent -4.9,-5.15 3.35,5.44, body extent -3.75,-5.15 3.75,5.15, height 2.65
"26-27 MCP1824T(-3002E/OT)(-1802E/OT)" [mm] "SOT23, 5-Leads, Body 2.90x2.70mm, Pitch 0.95mm, IPC Low Density"
  rect 1.25x0.65 smd: 1(-1.525,0.95) 2(-1.525,0) 3(-1.525,-0.95) 4(1.525,-0.95) 5(1.525,0.95)
  silkscreen extent -1.65,-1.55 0.5,1.95, body extent -0.9,-1.55 0.9,1.55, height 1.45
"29 LTC3621IDCB-3.3" [mm] "SON, 6-Leads, Body 2.00x3.00mm, Pitch 0.50mm, Thermal Pad 1.35x1.65mm, IPC Low Density"
  rect 0.9x0.25 smd mask+0.1: 1(-1.495,0.5) 2(-1.495,0) 3(-1.495,-0.5) 4(1.495,-0.5) 5(1.495,0) 6(1.495,0.5)
  rect 1.65x1.35 smd: 7(0,0)
  silkscreen extent -2.15,-1.2 1.7,1.25, body extent -1.55,-1.05 1.55,1.05, height 0.8
100A_N [mm] "Thin QFP, 100-Leads, Body 14x14mm, Pitch 0.5mm, IPC Medium Density"
  oval 1.8x0.3 smd: 1(-7.55,6) 2(-7.55,5.5) 3(-7.55,5) 4(-7.55,4.5) 5(-7.55,4) 6(-7.55,3.5) 7(-7.55,3) 8(-7.55,2.5) 9(-7.55,2) 10(-7.55,1.5) 11(-7.55,1) 12(-7.55,0.5) 13(-7.55,0) 14(-7.55,-0.5) 15(-7.55,-1) 16(-7.55,-1.5) 17(-7.55,-2) 18(-7.55,-2.5) 19(-7.55,-3) 20(-7.55,-3.5) 21(-7.55,-4) 22(-7.55,-4.5) 23(-7.55,-5) 24(-7.55,-5.5) 25(-7.55,-6) 51(7.55,-6) 52(7.55,-5.5) 53(7.55,-5) 54(7.55,-4.5) 55(7.55,-4) 56(7.55,-3.5) 57(7.55,-3) 58(7.55,-2.5) 59(7.55,-2) 60(7.55,-1.5) 61(7.55,-1) 62(7.55,-0.5) 63(7.55,0) 64(7.55,0.5) 65(7.55,1) 66(7.55,1.5) 67(7.55,2) 68(7.55,2.5) 69(7.55,3) 70(7.55,3.5) 71(7.55,4) 72(7.55,4.5) 73(7.55,5) 74(7.55,5.5) 75(7.55,6)
  oval 0.3x1.8 smd: 26(-6,-7.55) 27(-5.5,-7.55) 28(-5,-7.55) 29(-4.5,-7.55) 30(-4,-7.55) 31(-3.5,-7.55) 32(-3,-7.55) 33(-2.5,-7.55) 34(-2,-7.55) 35(-1.5,-7.55) 36(-1,-7.55) 37(-0.5,-7.55) 38(0,-7.55) 39(0.5,-7.55) 40(1,-7.55) 41(1.5,-7.55) 42(2,-7.55) 43(2.5,-7.55) 44(3,-7.55) 45(3.5,-7.55) 46(4,-7.55) 47(4.5,-7.55) 48(5,-7.55) 49(5.5,-7.55) 50(6,-7.55) 76(6,7.55) 77(5.5,7.55) 78(5,7.55) 79(4.5,7.55) 80(4,7.55) 81(3.5,7.55) 82(3,7.55) 83(2.5,7.55) 84(2,7.55) 85(1.5,7.55) 86(1,7.55) 87(0.5,7.55) 88(0,7.55) 89(-0.5,7.55) 90(-1,7.55) 91(-1.5,7.55) 92(-2,7.55) 93(-2.5,7.55) 94(-3,7.55) 95(-3.5,7.55) 96(-4,7.55) 97(-4.5,7.55) 98(-5,7.55) 99(-5.5,7.55) 100(-6,7.55)
  silkscreen extent -7.68,-6.25 6.25,6.82, body extent -7,-7 7,7, height 1.2
961104-6404-AR [mm] "3M- 4pos vert header"
  round 1.8 hole 1: 1(0,0) 2(2.54,0) 3(5.08,0) 4(7.62,0)
  silkscreen extent -1.3,-1.3 8.89,1.3
961206-6404-AR [mm] "3M- 6pos vert 2x3 header"
  round 1.8 hole 1: 1(0,0) 2(2.54,0) 3(5.08,0) 4(0,-2.54) 5(2.54,-2.54) 6(5.08,-2.54)
  silkscreen extent -1.3,-3.81 6.35,1.3
1751303 [mm] "TERM BLOCK 8POS 3.5MM"
  round 1.8 hole 1.1: 1(0,0) 2(3.5,0) 3(7,0) 4(10.5,0) 5(14,0) 6(17.5,0) 7(21,0) 8(24.5,0)
  silkscreen extent -2,-3.6 26.5,3.6
748421245 [mm] "WU Balun 748421245"
  rect 0.35x1 smd: 1(0,0) 2(-0.65,0) 3(-1.3,0) 4(-1.3,-1.8) 5(-0.65,-1.8) 6(0,-1.8)
  silkscreen extent -1.75,-1.53 0.45,-0.27
AVX_BZ01 [mm] "AVX BZ01 Supercapacitor, 3-Leads"
  rect 5.8x3.5 smd: 1(-17.5,-6.5) 1(-17.5,6.5)
  rect 4.5x6 smd: 2(17.5,0)
  silkscreen extent -17.02,-9 14.5,9, body extent -14.5,-9 14.5,9, height 7.1
AXT524124 [mm] "panasonic 24 pos header"
  rect 0.23x0.92 smd: 1(0,-3.28) 2(0.4,-3.28) 3(0.8,-3.28) 4(1.2,-3.28) 5(1.6,-3.28) 6(2,-3.28) 7(2.4,-3.28) 8(2.8,-3.28) 9(3.2,-3.28) 10(3.6,-3.28) 11(4,-3.28) 12(4.4,-3.28) 13(4.4,0) 14(4,0) 15(3.6,0) 16(3.2,0) 17(2.8,0) 18(2.4,0) 19(2,0) 20(1.6,0) 21(1.2,0) 22(0.8,0) 23(0.4,0) 24(0,0)
  rect 0.7x1.2 smd: 25(-0.9,-0.14) 26(5.3,-0.14) 27(-0.9,-3.14) 28(5.3,-3.14)
  silkscreen extent -1.45,-3.93 5.85,0.65
BLM15 [mm] "Chip Ferrite Bead, 0402"
  rect 0.57x0.62 smd: 1(-0.47,0) 2(0.47,0)
  body extent -0.53,-0.28 0.53,0.27, height 0.55
LITEON_LTST-C150 [mm] "1206, Chip LED"
  rect 1.1x1.75 smd: A(-1.625,0) K(1.625,0)
  silkscreen extent -0.7,-0.77 0.7,0.77, body extent -1.6,-0.8 1.6,0.8, height 1.1
MOLEX_0733910060 [mm] "SMA Connector"
  round 2.5 hole 1.6: PIN(0,0) SHIELD(-2.54,-2.54) SHIELD(-2.54,2.54) SHIELD(2.54,-2.54) SHIELD(2.54,2.54)
  silkscreen extent -6.35,-6.35 6.35,6.35
MURATA_GRM_0402 [mm] "0402 Chip Capacitor"
  rect 0.76x0.72 smd: 1(-0.49,0) 2(0.49,0)
  body extent -0.53,-0.28 0.53,0.27, height 0.55
MURATA_GRM_0603 [mm] "Chip Capacitor, 0603"
  rect 0.95x1.05 smd: 1(-0.725,0) 2(0.725,0)
  body extent -0.85,-0.45 0.85,0.45, height 0.9
NORDIC_nRF24L01P [mm]
  oval 0.95x0.25 smd: 1(-1.95,1) 2(-1.95,0.5) 3(-1.95,0) 4(-1.95,-0.5) 5(-1.95,-1) 11(1.95,-1) 12(1.95,-0.5) 13(1.95,0) 14(1.95,0.5) 15(1.95,1)
  oval 0.25x0.95 smd: 6(-1,-1.95) 7(-0.5,-1.95) 8(0,-1.95) 9(0.5,-1.95) 10(1,-1.95) 16(1,1.95) 17(0.5,1.95) 18(0,1.95) 19(-0.5,1.95) 20(-1,1.95)
  silkscreen extent -2.92,-2.15 2.15,2.15, body extent -2,-2 2,2, height 0.95
PANASONIC_ELJRF [mm] "Chip Inductor"
  rect 0.64x0.72 smd: 1(-0.53,0) 2(0.53,0)
  body extent -0.52,-0.28 0.53,0.27, height 0.55
PANASONIC_ERJ1T [mm] "RES SMD 2512"
  rect 1.15x3.35 smd: 1(-3.05,0) 2(3.05,0)
  silkscreen extent -2.1,-1.58 2.1,1.58, body extent -3.2,-1.6 3.2,1.6, height 0.6
PANASONIC_ERJ2R_SERIES [mm] "0402 Resistor"
  rect 0.65x0.65 smd: 1(-0.5,0) 2(0.5,0)
  body extent -0.53,-0.27 0.53,0.28, height 0.4
PANASONIC_ERJ3R [mm] "Chip Resistor, 0603"
  rect 0.9x1.05 smd: 1(-0.725,0) 2(0.725,0)
  body extent -0.87,-0.48 0.87,0.48, height 0.55
PJ-002AH-SMT [mm] "Barrel Jack Footprint"
  rect 2.4x2.8 smd: 1(0,4.5) 1(6.1,4.5) 2(0,-4.5) 3(6.1,-4.5)
  round 0 hole 1.8 unplated: 5(4.5,0)
  round 0 hole 1.6 unplated: 6(0,0)
  silkscreen extent -5.5,-5.9 9.8,5.7
sf1186g [mm] "SAW RF FILTER 1575.42 MHZ"
  rect 1.04x0.78 smd: 1(0,0) 2(1.55,0) 3(1.55,1.3) 4(0,1.3)
  silkscreen extent -0.95,-0.75 2.22,1.83
ST(P/B)36NF06L [mm] "D2-PAK, 3-Pads, Body 7.77x8.56mm (max), IPC Medium Density"
  rect 4.35x1.05 smd: 1(-6.15,2.54) 3(-6.15,-2.54)
  rect 9.2x10.5 smd: 2(3.65,0)
  silkscreen extent -6.27,-5.2 -1.35,5.2, body extent -2.9,-5.2 6.45,5.2, height 4.6
TDK_RLF7030 [mm] "Precision Wire Wound Inductor, 2-Leads, Body 7.25x6.80mm"
  rect 2.65x2.1 smd: 1(-2.925,0) 2(2.925,0)
  silkscreen extent -3.65,-3.45 3.65,3.45, body extent -3.65,-3.45 3.65,3.45, height 3.2
TESTPOINT [mm]
  round 1 smd paste-0.5: 1(0,0)
TPS79630 [mm] "TI ultra-low noise LDO, 6 pins"
  rect 2.25x0.6 smd: 1(-2.9,2.54) 2(-2.9,1.27) 3(-2.9,0) 4(-2.9,-1.27) 5(-2.9,-2.54)
  rect 2.25x3.2 smd: 6(2.9,0)
  silkscreen extent -3.03,-3.3 1.5,3.51, body extent -1.78,-3.27 1.78,3.27, height 1.8
TXC_7B_SERIES [mm] "Crystal"
  rect 2x1.2 smd: PAD(-1.85,1.1) PAD(1.85,-1.1) XTAL_N(1.85,1.1) XTAL_P(-1.85,-1.1)
  silkscreen extent -3.3,-2.1 3.3,2.1, body extent -2.6,-1.7 2.6,1.7, height 0.9

## Part data
C1 C2 C4 C7 C9 C37 C38 C41: library part CAP_MURATA_GRM188R71C104KA01D, "CAP CER 0.1UF 16V 10% X7R 0603"
C3 C8 C42: library part CAP_MURATA_GRM188R61C475MAAJD, "CAP CER 4.7UF 16V 20% X5R 0603"
C5 C6 C29 C32 C34: library part CAP_MURATA_GRM155R61A105KE15D, "CAP CER 1uF 10volts X5R 10% 0402"
C10 C22 C23 C24 C25 C27 C28 C30 C33 C39: library part CAP_MURATA_GRM188R60J106, "CAP CER 10UF 6.3V 20% X5R 0603"
C11 C12 C13 C14 C15 C16 C17 C18 C19 C20 C40 C55: library part CAP_MURATA_GRM188R70J104KA01D, "CAP CER 0.1UF 6.3V 10% X7R 0603"
C26 C31: library part CAP_MURATA_GRM188R61A226ME15D, "CAP CER 22UF 10V 20% X5R 0603"
C35 C36: library part BZ01CA223ZSB, "CAP 22MF -20% +80% 12V SMD"
C43: library part CAP_MURATA_GRM188R71E224KA88D, "CAP CER 0.22UF 25V 10% X7R 0603"
C44: library part CAP_MURATA_GRM155R71C103KA01D, "CAP CER 10000PF 16V 10% X7R 0402"
C45: library part CAP_MURATA_GRT155R61C474KE01D, "CAP CER 0.47UF 16V 10% X5R 0402"
C46: library part CAP_MURATA_GRM188R71C333KA01D, "CAP CER 0.033UF 16V 10% X7R 0603"
C47: library part CAP_MURATA_GJM1555C1H1R5BB01D, "CAP CER 1.5PF 50V NP0 0402"
C48: library part CAP_MURATA_GJM1555C1H1R0BB01D, "CAP CER 1PF 50V NP0 0402"
C49: library part MURATA_GRM155R71C222KA01D, "CAP CER 2200PF 16V 10% X7R 0402"
C50: library part MURATA_GRM1555C1H4R7CA01D, "CAP CER 4.7PF 50V NP0 0402"
C51: library part CAP_MURATA_GRM188R71H103MA01D, "CAP CER 10000PF 50V 20% X7R 0603"
C52: library part CAP_MURATA_GRM188R71H102KA01D, "CAP CER 1000PF 50V 10% X7R 0603"
C53 C54: library part CAP_MURATA_GRM1885C1H220JA01D, "CAP CER 22PF 50V 5% NP0 0603"
D1 D2 D3: "LED RED CLEAR 1206 SMD"
J1 J2 J4: "CONN SMA JACK STR 50 OHM PCB"
J3: "CONN SOCKET F4S .4MM 24POS SMD"
J5: "CONN HEADER VERT SGL 4POS GOLD"
J6 J7 J9 J12 J13 J14 J15 J16: "CONN HEADER VERT SGL 2POS GOLD"
J8: "CONN POWER JACK 2.1X5.5MM HI CUR"
J10: "CONN TERM BLOCK 8POS 3.5MM"
J11: "CONN HEADER VERT DUAL 6POS GOLD"
L2 L4: "FERRITE CHIP 220 OHM 200MA 0402"
L5 L6: library part TDK_IND_RLF7030T-6R8M2R8, "FIXED IND 6.8UH 2.8A 37.3 MOHM"
L7: library part PANASONIC_ELJ-RF3N9DFB, "FIXED IND 3.9NH 360MA 150 MOHM"
L8: library part PANASONIC_ELJ-RF8N2JFB, "FIXED IND 8.2NH 320MA 350 MOHM"
L9: library part PANASONIC_ELJ-RF2N7ZFB, "FIXED IND 2.7NH 400MA 100 MOHM"
Q1 Q2 Q3 Q4: "MOSFET N-CH 60V 30A TO-220"
R1 R9 R10 R15 R16 R25 R26: library part RES_PANASONIC_ERJ-3GEYJ104V, "RES SMD 100K OHM 5% 1/10W 0603"
R2 R5 R7: library part RES_PANASONIC_ERJ-3GEYJ151V, "RES SMD 150 OHM 5% 1/10W 0603"
R3 R11 R12 R17 R18: library part RES_PANASONIC_ERJ-2GEJ333X, "RES SMD 33K OHM 5% 1/10W 0402"
R4 R6 R23: library part RES_PANASONIC_ERJ-3GEYJ103V, "RES SMD 10K OHM 5% 1/10W 0603"
R8: library part RES_PANASONIC_ERJ-1TYJ101U, "RES SMD 100 OHM 5% 1W 2512"
R13 R14 R19 R20: library part RES_PAN_ERA-3AED153V, "RES SMD 15K OHM 0.5% 1/10W 0603"
R21 R22: library part RES_PANASONIC_ERJ-2RKF4701X, "RES SMD 4.7K OHM 1% 1/10W 0402"
R24: library part RES_PANASONIC_ERJ-3EKF2202V, "RES SMD 22K OHM 1% 1/10W 0603"
U1: "ACCELEROMETER LOW G 3-AXIS DFN"
U2: "Accelerometers X-AXIS 100G"
U3: "ZIGBEE FRONT END MODULE"
U4: "BALUN EMBER351 & 357 0805 SMD"
U5: "MAX-7Q ublox GPS chip"
U6: "SAW Filter MuRata"
U7: "8/16-bit AVR XMEGA A1 Microcontroller, 1.6-3.6V, 128KB + 8KB Flash, 2KB EEPROM, 8KB SRAM, 100-pin TQFP, Industrial Grade (-40°C to 85°C), Pb-Free"
U8: "IC FLASH 1GBIT 133MHZ 16SOIC"
U9: "IC REG LDO 1.8V 0.3A SOT23-5"
U10 U13: "IC REG BUCK 3.3V 1A SYNC 6DFN"
U11: "IC REG LDO 3V 0.3A SOT23-5"
U12: "IC REG LDO 3V 1A SOT223-6"
U14: "BAROMETRIC PRESSURE SENSOR"
U15: library part SI7021-A20-GM, "IC TEMP SENSOR RH 3% 6DFN"
U16: "IC GYROSCOPE MEMS 3AXIS LP 16LGA"
U17: "IC COMPASS 3 AXIS I2C 16LCC SMD"
U18: "IC RF TRANSCEIVER 2.4GHZ 20QFN"
X1: library part CRYSTAL_TXC_7B-16.000MAAE-T, "CRYSTAL 16.0000MHZ 12PF SMD"
Z1 Z3 Z4 Z6 Z7 Z9: "Generic Capacitor 0402 Package"
Z2 Z5 Z8: "Generic Inductor 0402 Package"

## Free pads (board coordinates)
  round 0 hole 128.5 unplated: NPTH-0(150,150) NPTH-1(150,3100) NPTH-2(5950,3100) NPTH-3(5950,150)

## Via types
v1: diameter 32, hole 20, Top Layer to Bottom Layer, 416 vias
v2: diameter 30, hole 20, Top Layer to Bottom Layer, 2 vias
v3: diameter 32, hole 20, Top Layer to Bottom Layer, tented top, 1 vias

## Nets (pads, with @x,y where several pads share a name; then routed paths per layer and width w, separated by ;. In a path a pad name is that pad's centre, name@x,y a point inside that pad or via, vN(x,y) a via of type N, cw(c..) or ccw(c..) an arc to the next point about the centre after c; other vN are vias at no path point)
1AX_ARM: TP2.1 U2.6 U7.96 | length 2828.8
  Top Layer w10: U2.6@1987.09,1966.69 1987.09,1725.29 2135,1577.37 2135,615 v1(2140,610) ; U7.96@3128.94,979.21 3128.94,937.04 3150,915.97 3150,915 v1(3175,915)
  Bottom Layer w10: v1(2140,610) 3110,610 3180,680 3181,679 3181,823.27 3180,824.27 3180,846.82 3182,848.82 3182,872.67 3180.68,873.99 3180.68,896.36 3181,896.68 3181,909 v1(3175,915)
3AX_INT1: TP11.1 U1.11 U7.5 | length 2786.4
  Top Layer w10: v1(2195,1095) v1(2195,1740) ; U1.11@2555.87,2130 2630,2130 TP11.1@2785,1975 v1(2785,1895) ; v1(3150,1105) 3163.98,1118.98 U7.5@3268.7,1118.98
  Bottom Layer w10: v1(2195,1095) 2195,1090 2205,1080 2408.23,1080 2409.23,1081 2686,1081 2727,1122 2915.95,1122 2932.95,1105 v1(3150,1105) ; v1(2195,1740) 2233.18,1740 2272,1778.82 2272,1780.23 2336.77,1845 2735,1845 v1(2785,1895)
3AX_INT2: TP13.1 U1.9 U7.6 | length 2563.8
  Top Layer w10: v1(2245,1790) 2245,1120 v1(2255,1110) ; U1.9@2555.87,2090.63 2604.37,2090.63 2631,2064 v1(2631,1876) ; U7.6@3268.7,1138.66 3271.48,1135.88 3305.23,1135.88 3306.11,1135 3340,1135 3335,1130 v1(3335,1125)
  Bottom Layer w10: v1(2245,1790) 2247.63,1790 2333.63,1876 v1(2631,1876) ; v1(2255,1110) 2623.06,1110 2651.06,1138 3272,1138 3285,1125 v1(3335,1125) v1@3335,1127
AVCC_CAP: C19.1 C20.1 C22.1 L4.1 U7.4 U7.94 | length 234.1
  Top Layer w15: C20.1@3060,878.54 3089.57,908.11 U7.94@3089.57,979.21 ; U7.4@3268.7,1099.29 3318.99,1099.29 3322.78,1095.5 3381.96,1095.5 C19.1@3386.46,1100
BATT_SENSE: R1.2 R3.1 TP3.1 U7.97 | length 2730.5
  Top Layer w10: U7.97@3148.62,979.21 v1(3148.62,1034.65) ; v1(4480,960) 4480,1930 TP3.1@4545,1995 4545,2136.02 R1.2@4578.98,2170 R3.1@4578.98,2228.86
  Bottom Layer w10: v1(3148.62,1034.65) 3224.27,959 4474,959 v1@4480,965
GND: C1.2 C2.2 C3.2 C4.2 C5.1 C6.1 C7.2 C8.2 C9.2 C10.2 C11.2 C12.2 C13.2 C14.2 C15.2 C16.2 C17.2 C18.2 C19.2 C20.2 C22.2 C23.2 C24.2 C25.2 C26.2 C27.2 C28.2 C29.2 C30.2 C31.2 C32.2 C33.2 C34.2 C35.2 C36.2 C37.2 C38.2 C39.2 C40.2 C41.2 C42.2 C43.2 C44.1 C46.2 C48.2 C49.2 C50.2 C51.2 C52.2 C53.2 C54.2 C55.2 D1.K D2.K D3.K J1.SHIELD J2.SHIELD J3.12 J3.17 J4.SHIELD J8.2 J8.3 J9.2 J11.3 J12.2 J13.2 J14.2 J15.2 J16.2 Q1.3 Q2.3 Q3.3 Q4.3 R3.2 R11.2 R12.2 R13.2 R14.2 R17.2 R18.2 R19.2 R20.2 R23.1 R24.2 U1.3 U1.5 U1.12 U1.13 U1.16 U2.2 U2.4 U2.7 U2.13 U2.14 U2.15 U3.2 U3.10 U3.17 U3.20 U3.22 U3.23 U4.2 U4.5 U5.1 U5.10 U5.12 U6.3 U6.4 U7.3 U7.13 U7.23 U7.33 U7.43 U7.53 U7.63 U7.73 U7.84 U7.93 U8.10 U9.2 U10.6 U10.7 U11.2 U12.3 U12.6 U13.6 U13.7 U14.3 U15.2 U16.8 U16.9 U16.10 U16.11 U16.12 U16.13 U17.9 U17.11 U17.12 U18.8 U18.14 U18.17 U18.20 X1.PAD Z2.1 Z5.1 Z8.1 | length 4076
  Top Layer w8: v1(990,1160) C48.2@1036.42,1160
  Top Layer w10: v1@842.02,1467.07 862.93,1467.07 895.47,1434.53 U3.20@957.24,1434.53 ; C52.2@946.65,837.28 985.51,798.43 U18.17@1009.17,798.43 ; v1@1005,1530 1005.47,1529.53 U3.17@1005.47,1482.76 ; v1@1418.54,145 1445,145 1460,160 D3.K@1460,206.02 ; J3.17@1606.73,2690 1606.95,2690.22 1606.95,2712.67 1620,2725.71 v1(1620,2775) ; J3.12@1669.72,2560.87 1669.72,2540 1670,2540 v1(1695,2515) ; U11.2@2165.94,2920.03 2215.9,2920.03 2229.45,2933.58 C27.2@2270.9,2933.58 ; C14.2@3050,1743.54 C14.2@3055,1748.54 ; R23.1@3195,3035 R23.1@3197.09,3032.91 ; v1(3831.46,2895) 3831.46,2890 3841.46,2880 3841.46,2856.93 U17.9@3843.86,2854.53 ; U10.6@4038.66,750.32 U10.7@4077.84,750.32 ; R3.2@4617.21,2230 v1(4665,2230) ; U13.6@4646.14,2900.32 U13.7@4685.32,2900.32
  Top Layer w12: v1@545,2870 550,2875 ; 550,2900 551.61,2901.61 ; 906.7,1349.89 925,1368.18 925,1375.47 U3.23@957.24,1375.47 U3.22@957.24,1395.16 ; 990,1290 1005.47,1305.47 U3.2@1005.47,1327.24 ; U4.5@1004.13,1230.59 U4.2@1075,1230.59 ; U18.8@1162.72,778.74 1194.61,778.74 1198.2,775.16 ; U7.73@2674.21,1079.61 v1@2749.61,1079.61 ; U7.63@2674.21,1276.46 v1@2753.54,1276.46 ; U7.53@2674.21,1473.31 2738.31,1473.31 ; v1@2873.03,1496.97 U7.43@2873.03,1573.7 ; U7.84@2892.72,979.21 v1@2892.72,1052.72 ; U7.93@3069.88,979.21 v1@3069.88,1054.88 ; v1@3069.88,1495.12 U7.33@3069.88,1573.7 ; v1@3170,1276.46 U7.13@3268.7,1276.46 ; v1@3195,1079.61 U7.3@3268.7,1079.61 ; v1@3198.31,1473.31 U7.23@3268.7,1473.31
  Top Layer w13: U1.16@2481.06,2185.12 2481.06,2241.06 ; C44.1@3197.09,2974.29 R23.1@3197.09,3032.91
  Top Layer w15: v1(340,2795) Z8.1@388.27,2795 ; U6.4@430,2996.18 430,3045 ; v1@490,3050 491.02,3048.98 U6.3@491.02,2996.18 ; 550,2875 550,2900 ; 551.61,2901.61 U5.12@610,2901.61 ; U5.10@610,2988.23 610,3045 ; Z5.1@710,1566.73 v2@710,1610 ; Z2.1@756.73,1205 v2@805,1205 ; U3.10@1112.76,1414.84 1194.84,1414.84 v1(1205,1425) ; C32.2@1315,344.29 v1(1315,400) ; C33.2@1335,146.46 v1@1418.54,146.46 ; C10.2@1843.54,2785 1843.54,2848.54 v1(1845,2850) ; v1@2026.46,1905.43 U2.7@2026.46,1966.69 ; C23.2@2091.57,2532.44 v1(2148.03,2532.44) ; C28.2@2099.45,2805.03 v1(2155.9,2805.03) ; U9.2@2158.07,2642.44 v1(2208.03,2642.44) ; v1@2216.57,2645.98 C24.2@2263.03,2645.98 ; v1(2251.02,1955.87) C1.2@2251.02,2007.32 ; v1(2415,1455) C12.2@2471.46,1455 ; v1(2420,1050) 2466.46,1050 C18.2@2471.46,1055 ; v1(2420,1280) 2466.46,1280 C11.2@2471.46,1275 ; C4.2@2435,2298.54 2436.38,2298.54 2481.06,2253.86 2481.06,2241.06 ; v1@2445.63,2038.63 U1.5@2445.63,2090.63 ; C13.2@2850,1750 v1@2850,1801.46 ; v1(2870,750) C17.2@2870,811.46 ; C14.2@3055,1748.54 v1(3055,1795) ; v1(3060,760) C20.2@3060,821.46 ; C37.2@3243.54,2013.15 v1(3295,2013.15) ; C37.2@3249.61,2019.21 U14.3@3249.61,2100 ; v1(3374.37,2114.37) U15.2@3419.37,2114.37 ; C22.2@3437.09,820 v1(3493.54,820) ; C19.2@3443.54,1100 v1(3495,1100) ; C15.2@3443.54,1495 v1(3495,1495) ; C16.2@3448.54,1300 3453.54,1295 v1(3500,1295) ; v1(3599.37,1998.74) C38.2@3599.37,2055.2 ; C41.2@4095,2815 v1(4141.46,2815) ; C26.2@4286.06,295 v1@4286.06,348.54 ; C31.2@4898.54,2450 v1@4898.54,2498.54
  other v1: 1405,146.46 2800,285 5070,315 5135,315 1920,350 4287.52,350 925,360 4955,375 4955,445 1845,460 5045,465 5140,465 3967.52,610 921.65,618.74 1235,630 991.65,693.74 4057.52,700 1076.65,763.74 1111.65,783.74 1076.65,808.74 4187.52,835 831.65,838.74 1415,860 5010,860 294.28,870.77 896.65,908.74 484.39,912.73 524.39,912.73 564.39,912.73 604.39,912.73 644.26,915.89 4950,920 1165,925 677.81,937.68 177.26,959.43 706.09,965.96 1006.53,966.33 1250,990 734.38,994.25 177.11,999.43 4950,1005 1007.81,1006.31 762.65,1022.54 1265,1030 1335,1030 5040,1045 5140,1045 1006.87,1046.3 483.4,1047.27 523.4,1047.27 563.4,1047.27 602.97,1053.1 2895,1055 3070,1055 781.07,1058.05 1265,1075 2750,1075 3195,1080 631.26,1081.38 1010.56,1086.13 293.13,1089.38 782.27,1098.03 1255,1115 647.93,1117.74 1200,1120 1007.73,1126.03 1155,1130 780,1137.97 647.73,1157.74 1155,1175 786.25,1177.48 950,1185 642.11,1197.34 945,1230 645.18,1237.22 782.14,1257.03 1315,1260 2755,1275 3170,1275 650.32,1276.89 955,1285 782.27,1297.03 647.73,1316.81 801.97,1331.84 838.67,1347.73 878.67,1347.73 650.12,1356.74 4115,1390 670.83,1390.96 299.59,1416.47 259.62,1418.15 727.97,1452.49 687.97,1452.89 448.43,1457.73 488.43,1457.73 528.43,1457.73 568.43,1457.73 608.43,1457.73 767.53,1458.41 648.41,1458.81 839.65,1462.25 3195,1470 2750,1485 2875,1495 178.3,1499.16 3070,1500 940.25,1534.88 176.41,1539.11 1005,1540 911.97,1563.16 4930,1585 880.1,1587.34 641.35,1589.51 481.45,1592.27 521.45,1592.27 561.45,1592.27 601.45,1592.27 760.41,1592.27 800.41,1592.13 840.41,1592.27 680.86,1595.76 5045,1625 5135,1630 290.89,1634.48 3790,1775 2840,1800 2027.02,1904.87 4210,1930 5765,1945 4635,1950 1811.02,1950.87 5065,1965 5150,1970 4950,2020 2444,2037 4635,2045 5765,2065 4950,2105 1766.02,2105.87 2375,2140 5050,2145 5135,2150 416.95,2166.27 456.89,2168.61 2635,2195 537.11,2250.71 2026.02,2260.87 320.28,2276.7 538.38,2290.69 2690,2310 497.27,2439.19 362.73,2467.59 497.27,2479.19 4900,2500 362.73,2507.59 497.27,2519.19 362.73,2547.59 980,2555 497.27,2559.19 362.73,2587.59 497.27,2599.19 362.73,2627.59 497.27,2639.19 362.73,2667.59 497.27,2679.19 3273.54,2700 358.28,2707.34 503.9,2718.64 4565,2744.5 355.54,2747.24 504.03,2758.64 3786.46,2780 497.27,2798.06 362.73,2826.59 497.27,2838.06 5750,2845 4670,2850 535,2865 364.85,2866.53 491.59,2877.66 3273.54,2880 673.26,2922.85 2222.68,2926.81 349.24,2930.29 5750,2930 674.52,2962.83 350.22,2970.28 4810,2980 5595,2995 5660,2995 5830,2995 5895,2995 369.65,3005.24 550,3040 395,3045 500,3045 455,3050 635,3060 3083.54,3070
  other v2: 800,1215 720,1610
GYRO_INT1: TP14.1 U7.7 U16.7 | length 3968.5
  Top Layer w10: U16.7@3164.88,2712.24 3164.88,2610.12 3235,2540 v1(3295,2540) ; U7.7@3268.7,1158.35 3326.58,1158.35 3329.23,1161 3376.37,1161 3383.37,1154 3506,1154 v1(3555,1105) ; v1(4575,1115) 4575,1890 v1(4595,1910)
  Bottom Layer w10: v1(3295,2540) 3965,2540 v1(4595,1910) ; v1(3555,1105) 3565,1095 3573,1103 4563,1103 v1(4575,1115)
GYRO_INT2: TP15.1 U7.8 U16.6 | length 3890
  Top Layer w10: U16.6@3139.29,2712.24 3139.29,2545.71 3205,2480 v1(3295,2480) ; U7.8@3268.7,1178.03 3546.97,1178.03 3590,1135 v1(3590,1130) ; v1(4515,1165) 4515,1910 v1(4535,1930)
  Bottom Layer w10: v1(3295,2480) 3812,2480 3817,2475 3825,2475 3825.55,2474.46 3990.54,2474.46 v1(4535,1930) ; v1(3590,1130) 3590,1140 3601,1129 4317.82,1129 4318.82,1128 4341.18,1128 4342.18,1129 4360.77,1129 4384.77,1153 4386.18,1153 4398.18,1165 v1(4515,1165)
I2CE0_SDA: R22.2 TP57.1 U7.35 U14.7 U15.1 U17.16 | length 2052.6
  Top Layer w10: U7.35@3030.51,1573.7 3030.51,1644.58 3018,1657.09 3018,1664.56 3018.33,1664.89 3018.33,1699.3 3015,1702.63 3015,2230.63 3049.37,2265 3104.37,2265 3130.37,2291 3174.39,2291 3200.39,2265 ; U14.7@3200.39,2206.3 3200.39,2265 ; 3389.37,2265 3200.39,2265 ; U15.1@3418.98,2153.35 U15.1@3419.37,2153.74 3419.37,2173.74 3409.69,2183.43 R22.2@3409.69,2213.74 3409.69,2244.69 3389.69,2264.69 3612.44,2487.44 3732.44,2487.44 3929.66,2684.66 3929.66,2763.17 U17.16@3932.44,2765.95
I2CE1_SCL: R21.2 TP59.1 U7.36 U14.8 U15.6 U17.1 | length 2119.1
  Top Layer w10: v1(2980,1835) 2980,1715 3002.33,1692.67 3002.33,1671.51 3002,1671.18 3002,1648.82 3010.83,1639.99 U7.36@3010.83,1573.7 ; v1(3045,1835) 3045,2185 3080,2220 3104.37,2220 3144.37,2260 v1(3150,2260) ; v1@3149.37,2265 3151.18,2263.19 U14.8@3151.18,2206.3 ; U15.6@3533.54,2153.74 R21.2@3533.54,2213.74 ; R21.2@3539.69,2213.74 3534.37,2219.06 v1(3534.37,2265) 3660,2390.63 3688.63,2390.63 3824.46,2526.46 3841.46,2526.46 3955,2640 3955,2726.06 3961.97,2733.03 U17.1@3961.97,2795.47
  Bottom Layer w10: v1(2980,1835) v1(3045,1835) ; v1(3150,2260) 3529.37,2260 v1(3534.37,2265)
I2CF0_SDATA: J3.18 TP73.1 U7.45 | length 3392
  Top Layer w8: 1590,2800.12 1590,2690.98 J3.18@1590.98,2690 ; 1590.02,2800.14 1590.02,2812.56 ; 1590,2812.58 1590,2815
  Top Layer w10: v1(1325,1580) 1325,1596.37 1278,1643.37 1278,2823 1336,2881 1524,2881 1590,2815 ; U7.45@2833.66,1573.7 2833.66,1489.88 2834.17,1489.37 v1(2837,1489.37)
  Bottom Layer w10: 1337.5,1567.5 1390,1515 2296.82,1515 2305.82,1524 2510.82,1524 2527.82,1541 2782.54,1541 2834.17,1489.37 v1(2837,1489.37)
I2CF1_SCLK: J3.19 TP72.1 U7.46 | length 3449.5
  Top Layer w8: 1575.02,2806.35 1575.02,2690.22 J3.19@1575.24,2690
  Top Layer w10: v1(1450,1470) 1410,1510 1410,1534 1294,1650 1294,2805.37 1353.63,2865 1516.37,2865 1575.02,2806.35 ; v1(2810,1440) 2810,1515 2815,1520 2815,1572.68 U7.46@2813.98,1573.7
  Bottom Layer w10: v1(1450,1470) 1916.82,1470 1938.82,1492 1961.18,1492 1983.18,1470 2391.82,1470 2403.82,1482 2427.4,1482 2480.4,1429 2538.47,1429 2569.4,1459.94 2681.36,1459.94 2708.3,1433 2748.82,1433 2756.07,1440.25 2820.25,1440.25 2810,1430 v1(2810,1440)
MAG_DRDY: TP1.1 U7.95 U17.15 | length 4554
  Top Layer w10: v1(2290,1730) 2290,680 v1(2325,645) ; v1(2965,1885) 2965,2280 3015,2330 3243.23,2330 TP1.1@3460,2546.77 3589.98,2676.75 3881.75,2676.75 3912.76,2707.76 U17.15@3912.76,2765.95 ; U7.95@3109.25,979.21 3109.25,930.75 3155,885 v1(3155,860)
  Bottom Layer w10: v1(2290,1730) 2345,1785 2710,1785 2760,1835 2885,1835 2935,1885 v1(2965,1885) ; v1(2325,645) 3075,645 3155,725 3154,726 3155,727 v1(3155,860)
MEM_RST: TP30.1 U7.72 U8.3 | length 2291.6
  Top Layer w10: U7.72@2674.21,1099.29 2731.11,1099.29 2738.82,1107 2761.18,1107 2762.18,1106 2766,1106 2845,1185 v1(2855,1185) ; U8.3@4250,1575 4380,1575 4389,1566 4389,1474 4330,1415 v1(4330,1155)
  Bottom Layer w10: v1(2855,1185) 3123.87,1185 3153.15,1155.72 3192.06,1155.72 3195.74,1159.4 3298.7,1159.4 3304.1,1154 3567.23,1154 3574.23,1161 3595.77,1161 3596.77,1160 3890,1160 3895,1155 v1(4330,1155)
NetC5_2: C5.2 U2.3 | length 85.5
  Top Layer w10: C5.2@1806.77,2060.87 U2.3@1892.28,2060.87
NetC6_2: C6.2 U2.1 | length 84.9
  Top Layer w10: C6.2@1806.77,2140.87 U2.1@1891.65,2140.87
NetC7_1: C7.1 U1.2 | length 76.7
  Top Layer w10: C7.1@2383.54,2185 2418.86,2149.69 U1.2@2445.63,2149.69
NetC10_1: C10.1 J3.13 L2.1 | length 92.7
  Top Layer w8: J3.13@1669.72,2690 1669.72,2724.72
  Top Layer w12: C10.1@1786.46,2785 1786.46,2837.95 L2.1@1790,2841.5
NetC29_1: C29.1 U10.5 | length 65.4
  Top Layer w12: C29.1@3973.23,770 U10.5@4038.66,770
NetC34_1: C34.1 U13.5 | length 55.4
  Top Layer w12: C34.1@4590.71,2920 U13.5@4646.14,2920
NetC42_1: C42.1 U17.10 | length 58.7
  Top Layer w10: C42.1@3785.16,2834.84 U17.10@3843.86,2834.84
NetC43_1: C43.1 U17.8 | length 67.6
  Top Layer w12: U17.8@3873.39,2884.06 C43.1@3873.39,2951.61
NetC44_2: C44.2 C45.2 U16.14 | length 136.3
  Top Layer w12: U16.14@3164.88,2867.76 3164.88,2903.5 C44.2@3197.09,2935.71
  Top Layer w15: C44.2@3197.09,2935.71 C45.2@3252.09,2935.71
NetC45_1: C45.1 R23.2 | length 60.7
  Top Layer w15: C45.1@3252.09,2974.29 R23.2@3252.09,3035
NetC46_1: C46.1 U18.19 | length 67.4
  Top Layer w10: C46.1@950.24,738.74 966.65,738.74 986.97,759.06 U18.19@1009.17,759.06
NetC47_1: C47.1 L7.2 | length 50.2
  Top Layer w13.68: L7.2@1074.13,1015.87 1074.13,1064.84 C47.1@1075,1065.71
NetC47_2: C47.2 C48.1 U4.1 | length 100.7
  Top Layer w13.68: C47.2@1075,1104.29 C48.1@1075,1160 U4.1@1075,1205
NetC49_1: C49.1 C50.1 L9.2 U18.11 | length 334.4
  Top Layer w10: U18.11@1125.31,855.51 1125.83,855 1145,855 1215,925 C50.1@1215,1030.71 C49.1@1160.87,1030.71 L9.2@1160.87,975
NetC55_1: C55.1 U12.5 | length 88.5
  Top Layer w15: C55.1@1133.54,435 1154.17,414.37 U12.5@1154.17,355
NetD1_A: D1.A R2.1 | length 132.9
  Top Layer w15: D1.A@3962.52,411.02 3962.52,365 R2.1@4023.98,303.54
NetD2_A: D2.A R5.2 | length 125.8
  Top Layer w15: D2.A@4560,2536.02 4560,2475 4580,2455 R5.2@4616.46,2455
NetD3_A: D3.A R7.2 | length 79.6
  Top Layer w10: R7.2@1380,333.54 D3.A@1459.57,333.54
NetJ1_PIN: J1.PIN Z3.2 | length 513
  Top Layer w13.68: J1.PIN@285,980 625,980 715,1070 Z3.2@715,1115.71
NetJ2_PIN: J2.PIN Z6.2 | length 335.7
  Top Layer w13.68: J2.PIN@285,1525 Z6.2@620.71,1525